# Altium PCB DUTBoard_NO_CAPS.PcbDoc (part 1 of 5)
Units mil, origin at the board's own origin, x right, y up, seen from the top; angles counter-clockwise.
Board outline 5475 x 5475 mil, 4 copper layers (Top Layer, Mid-Layer 1, Mid-Layer 2, Bottom Layer); 57 components, 471 nets, 1641 pads, 1070 vias.
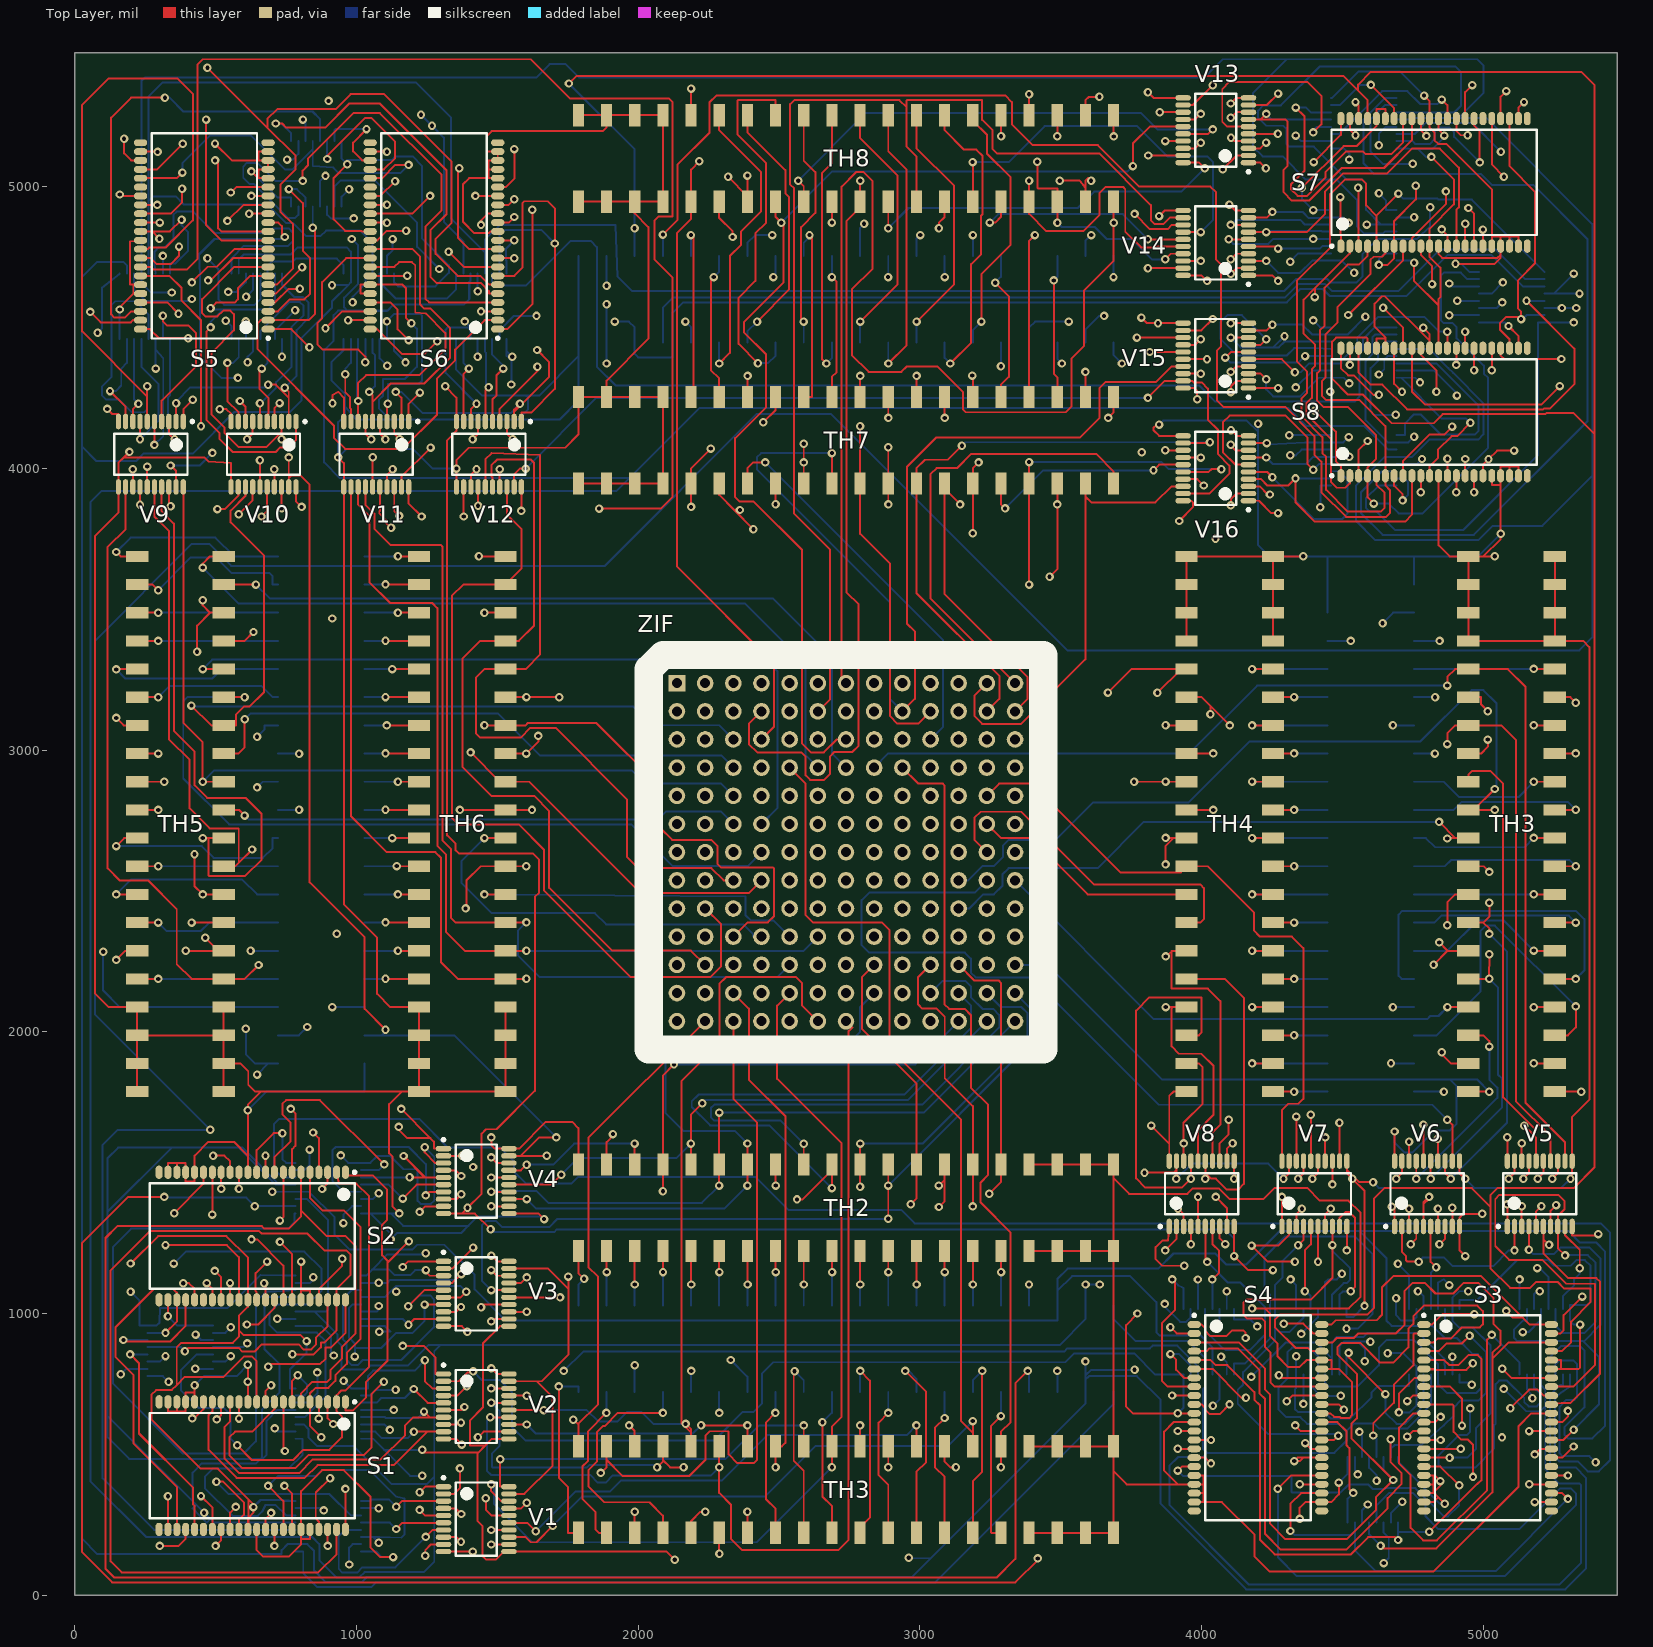
[diagram p0: Top Layer view]
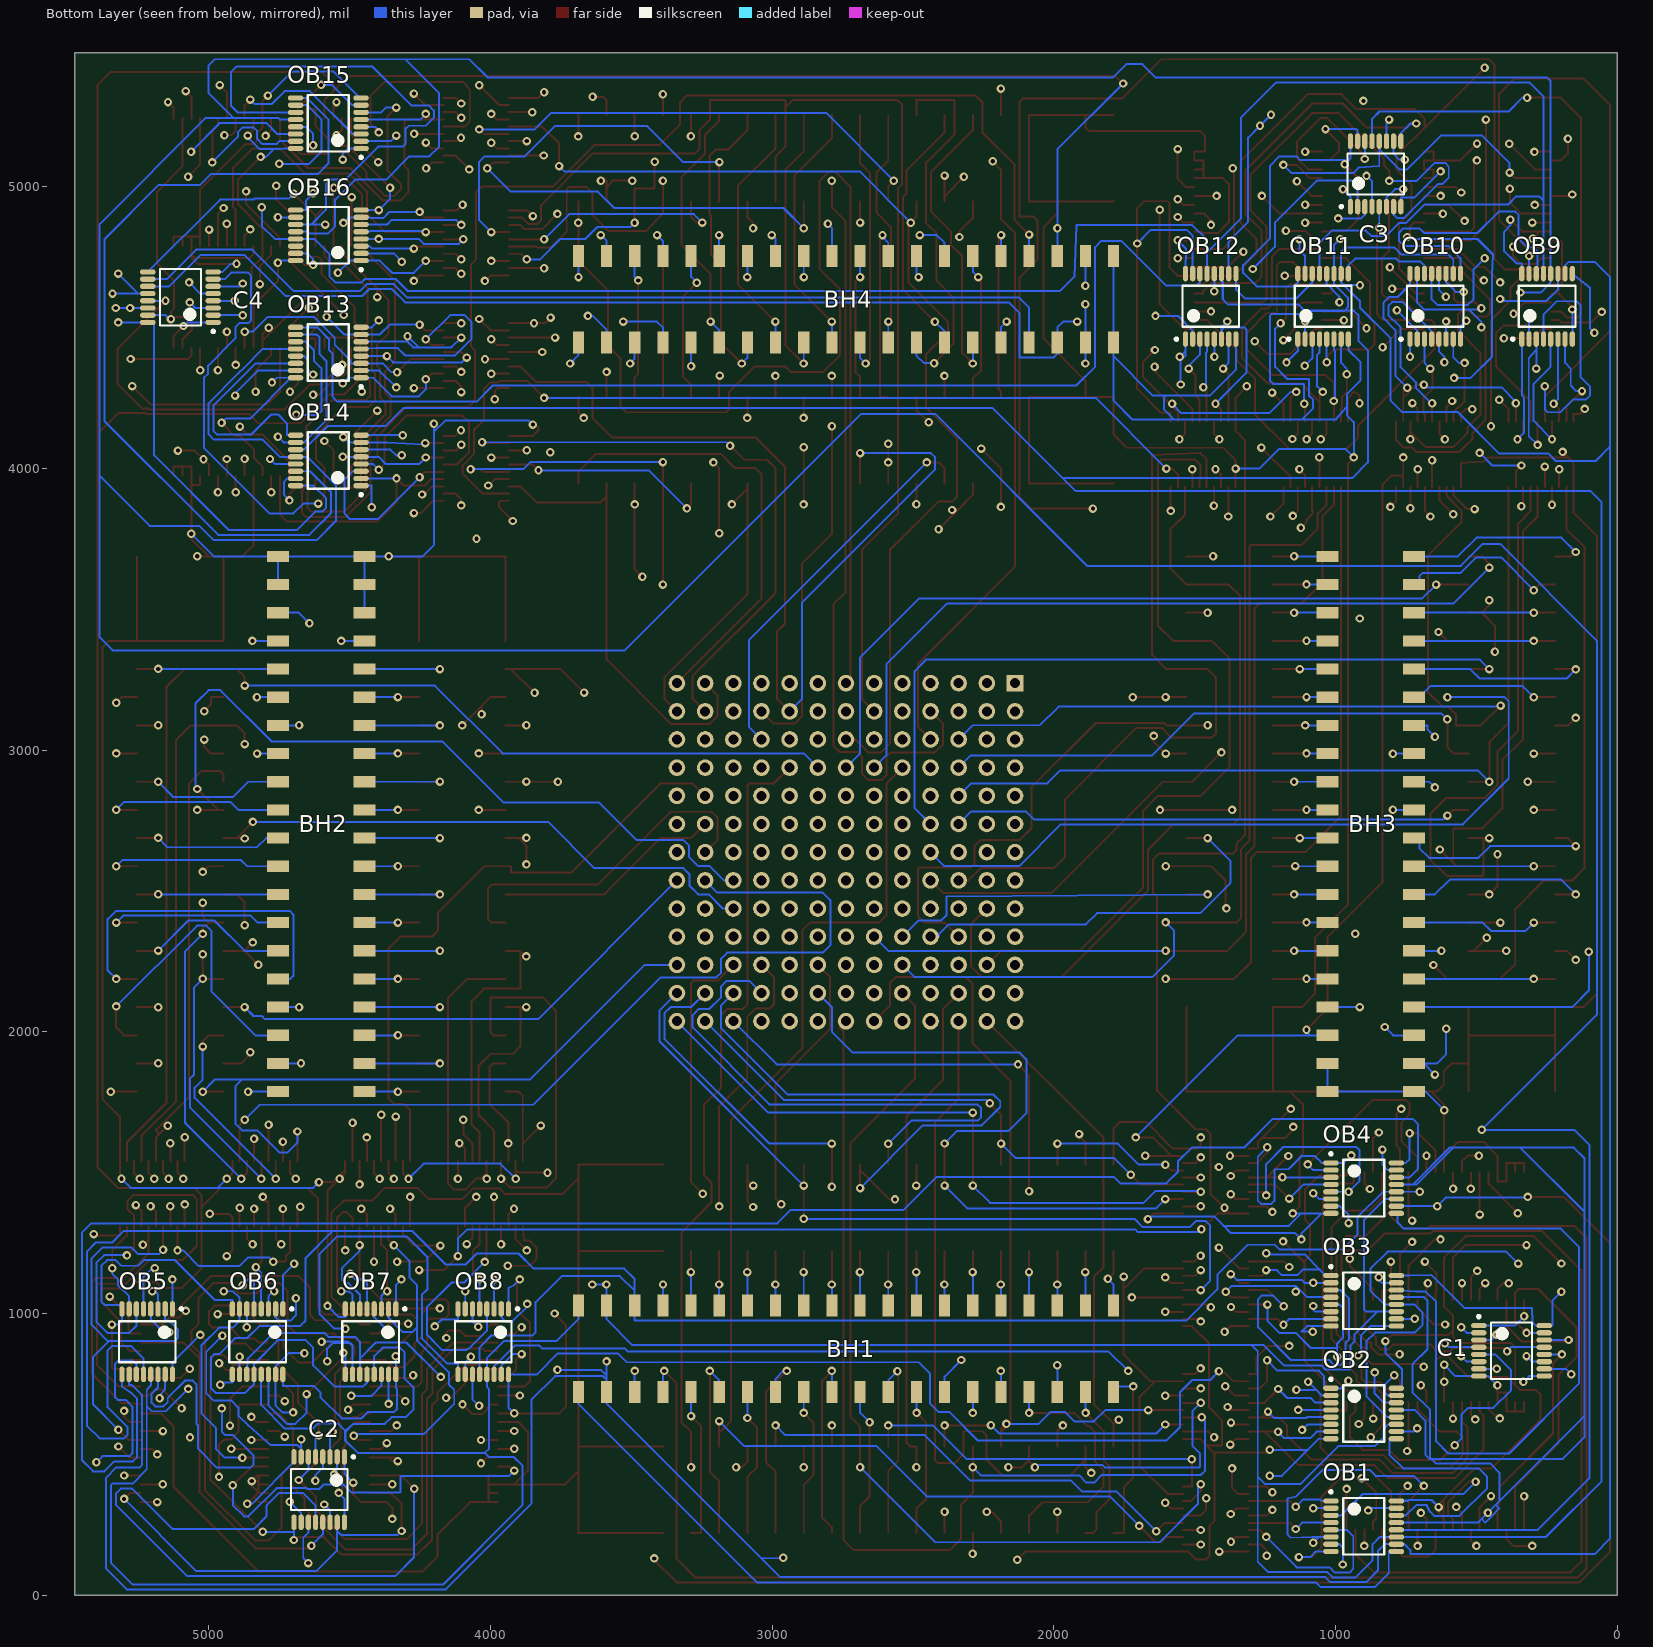
[diagram p1: Bottom Layer view, seen from below]
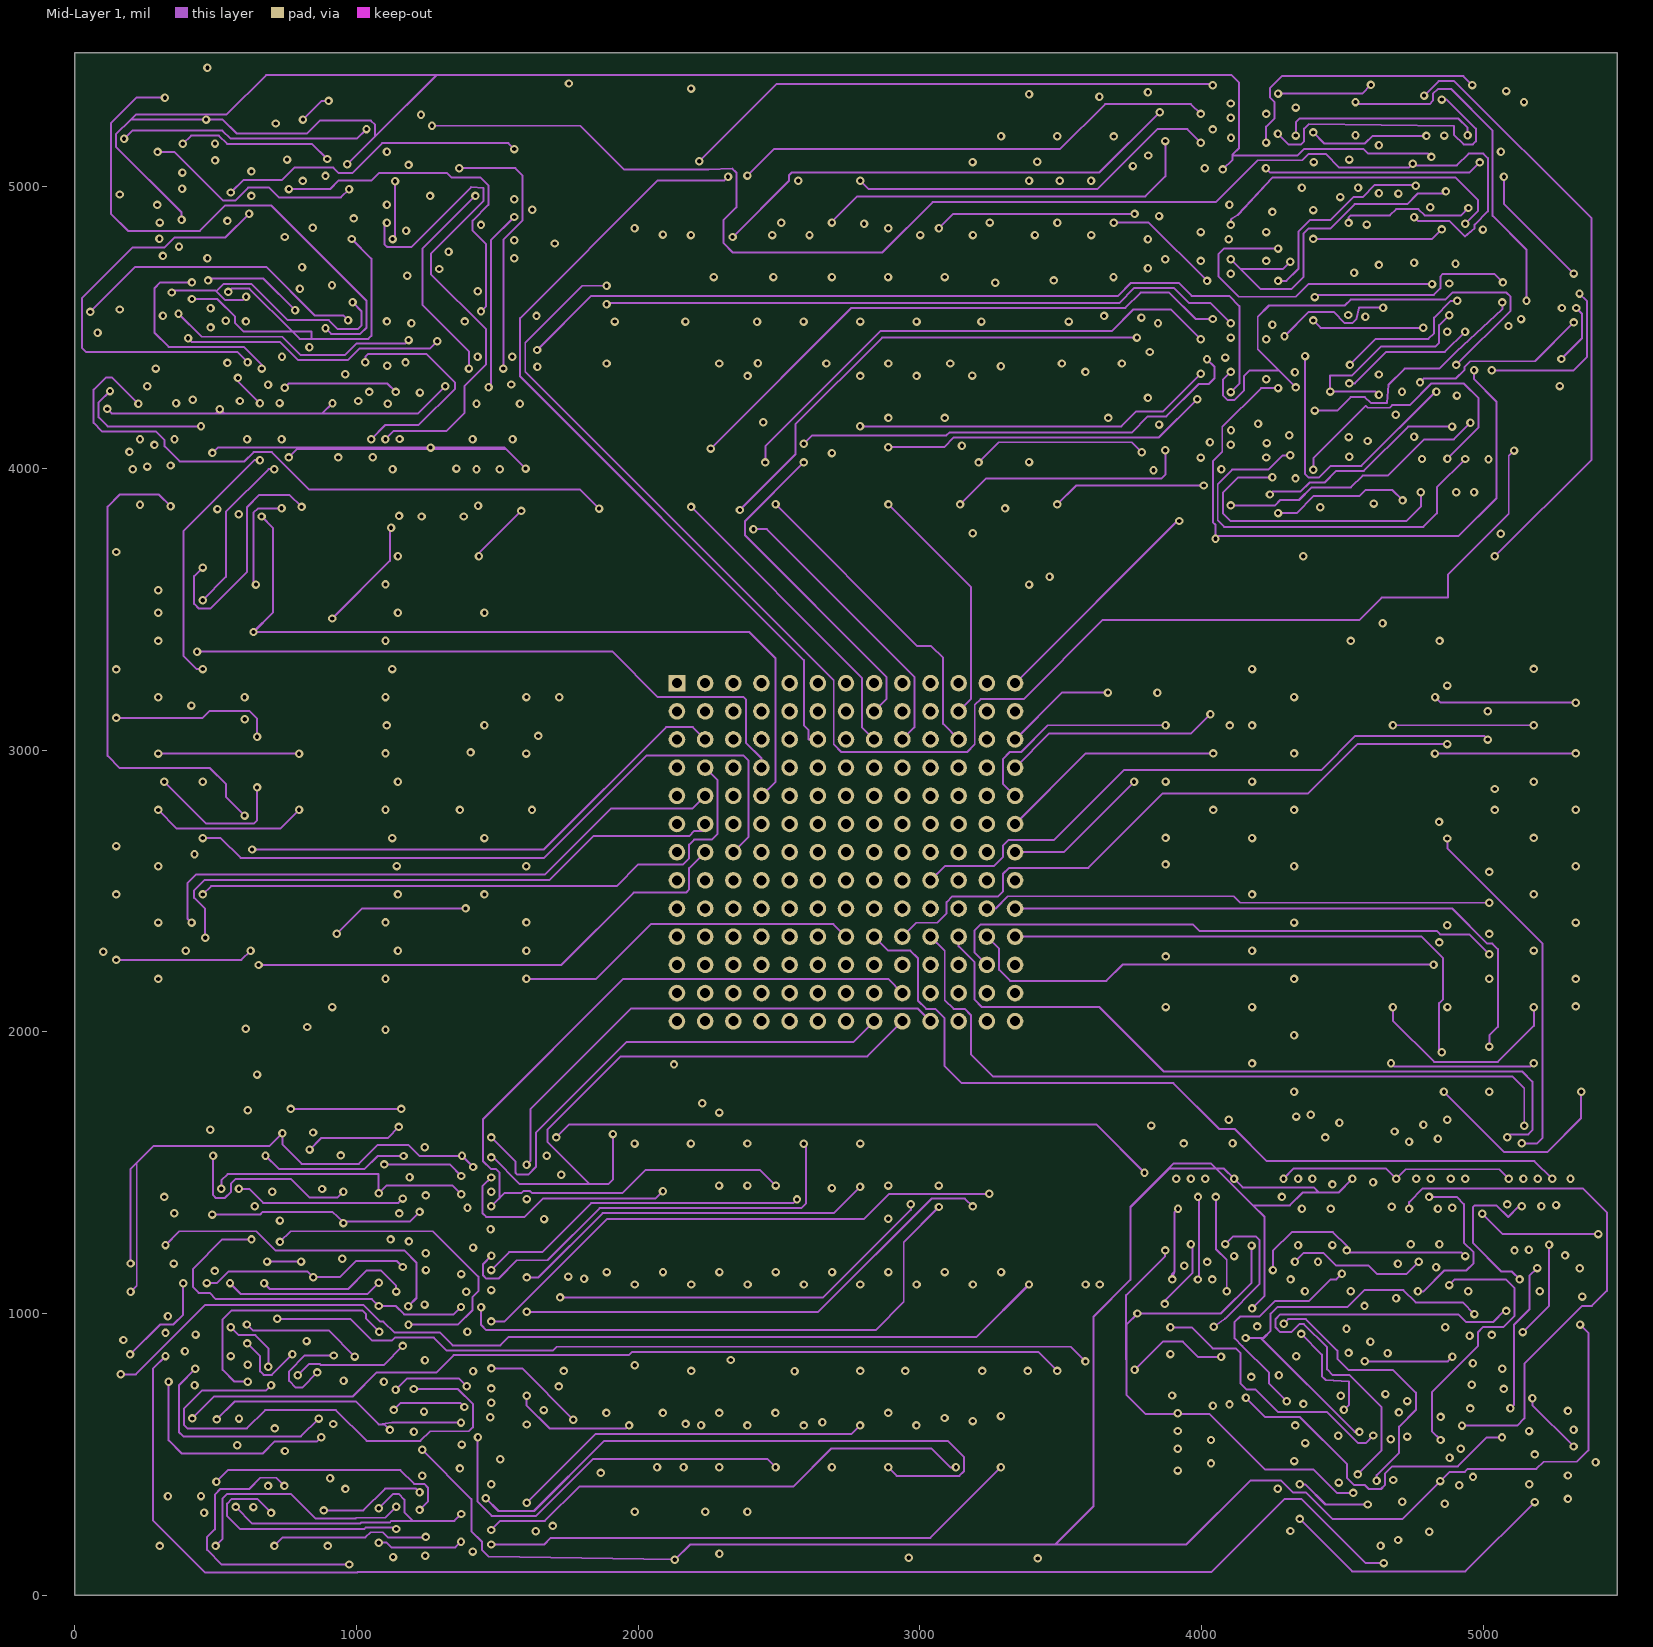
[diagram p2: Mid-Layer 1]
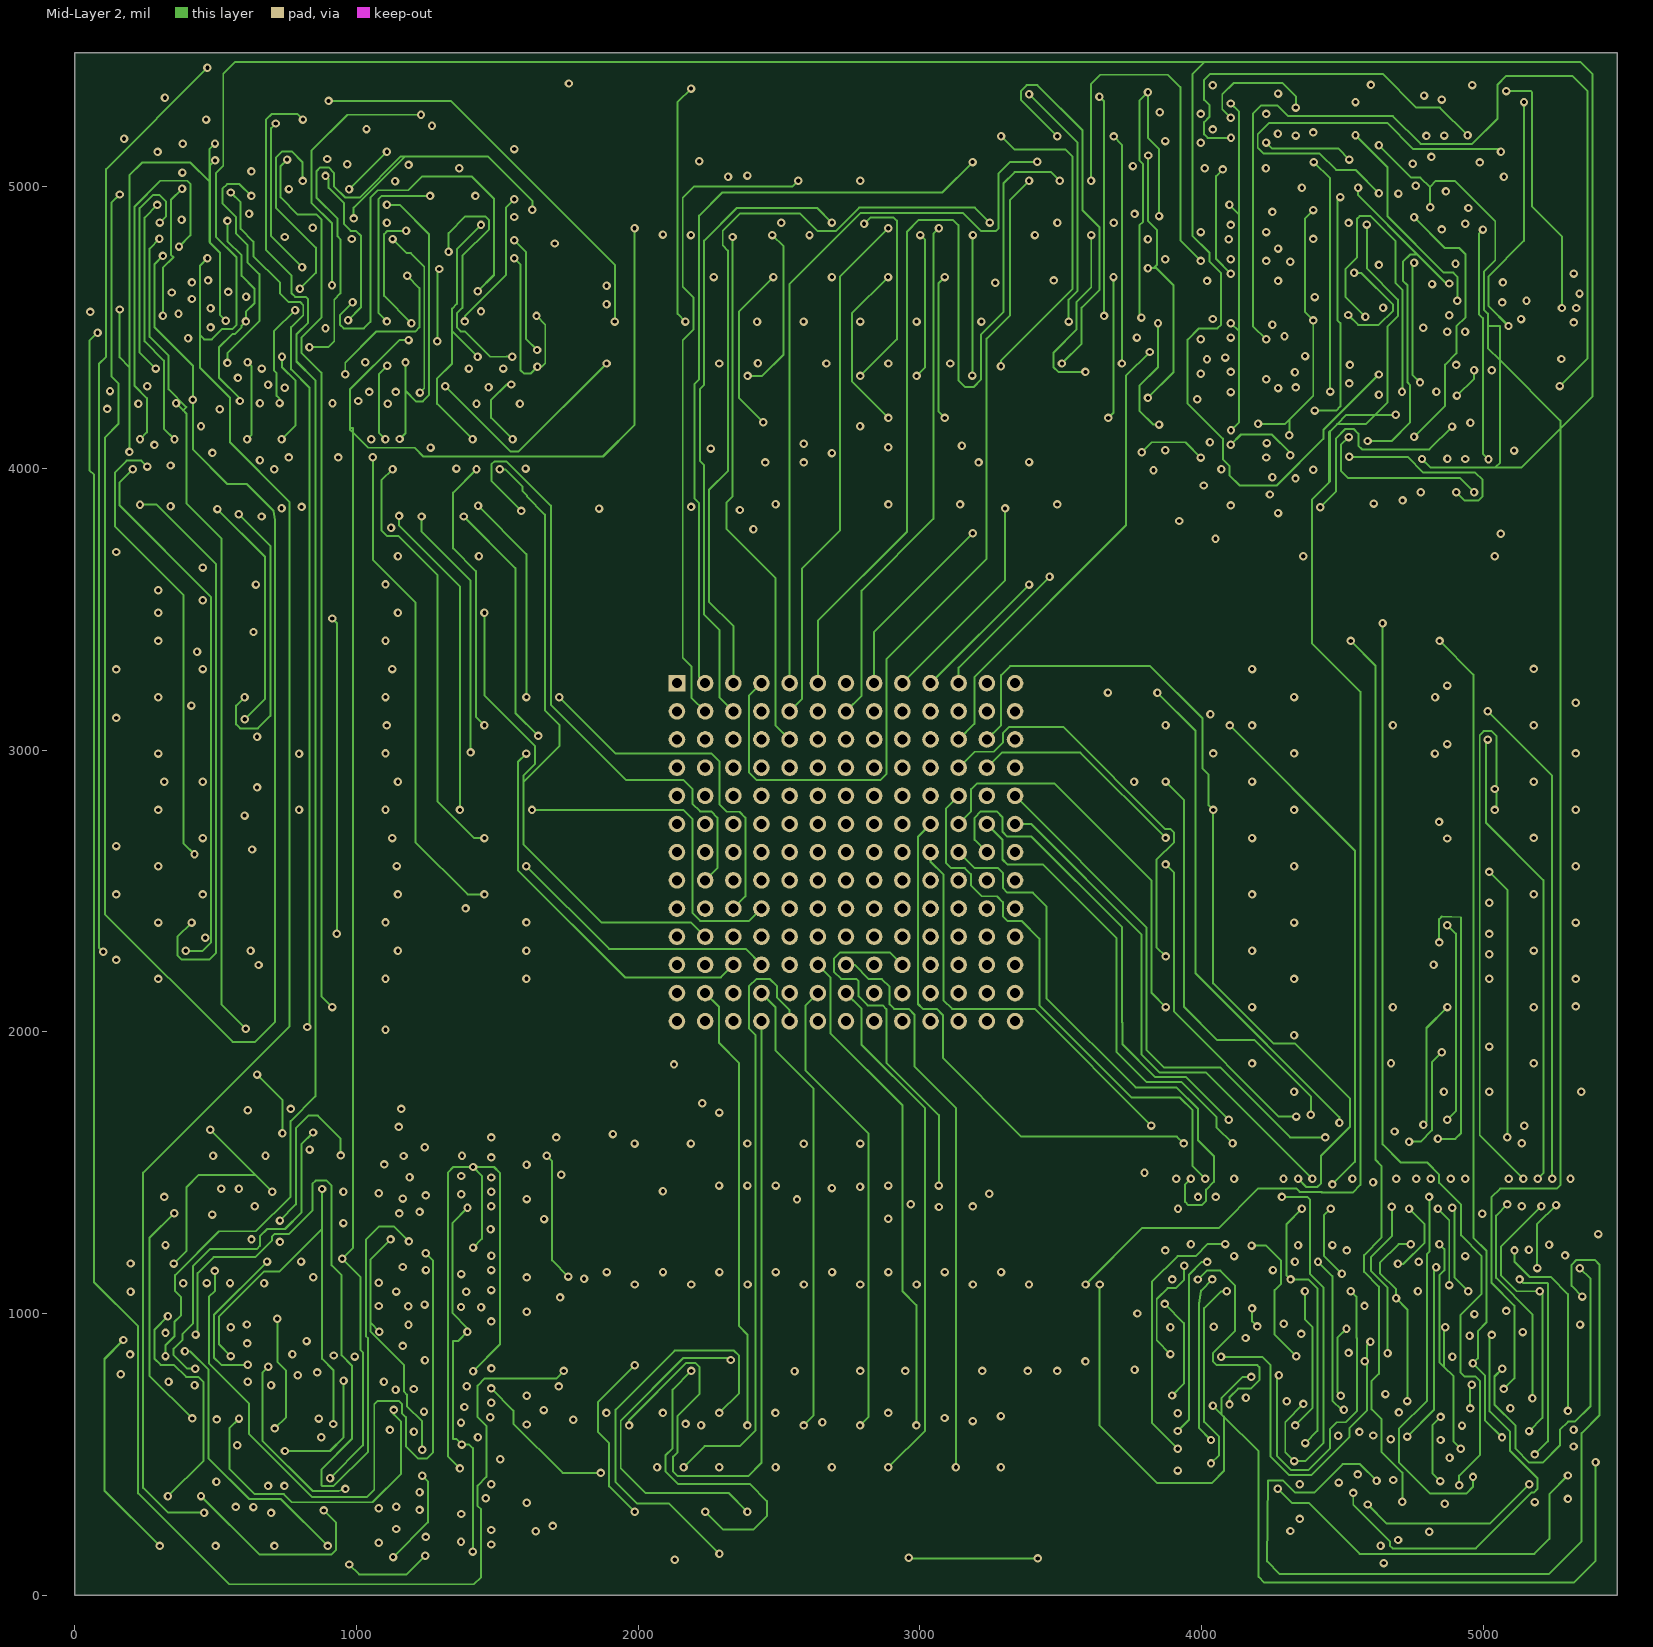
[diagram p3: Mid-Layer 2]
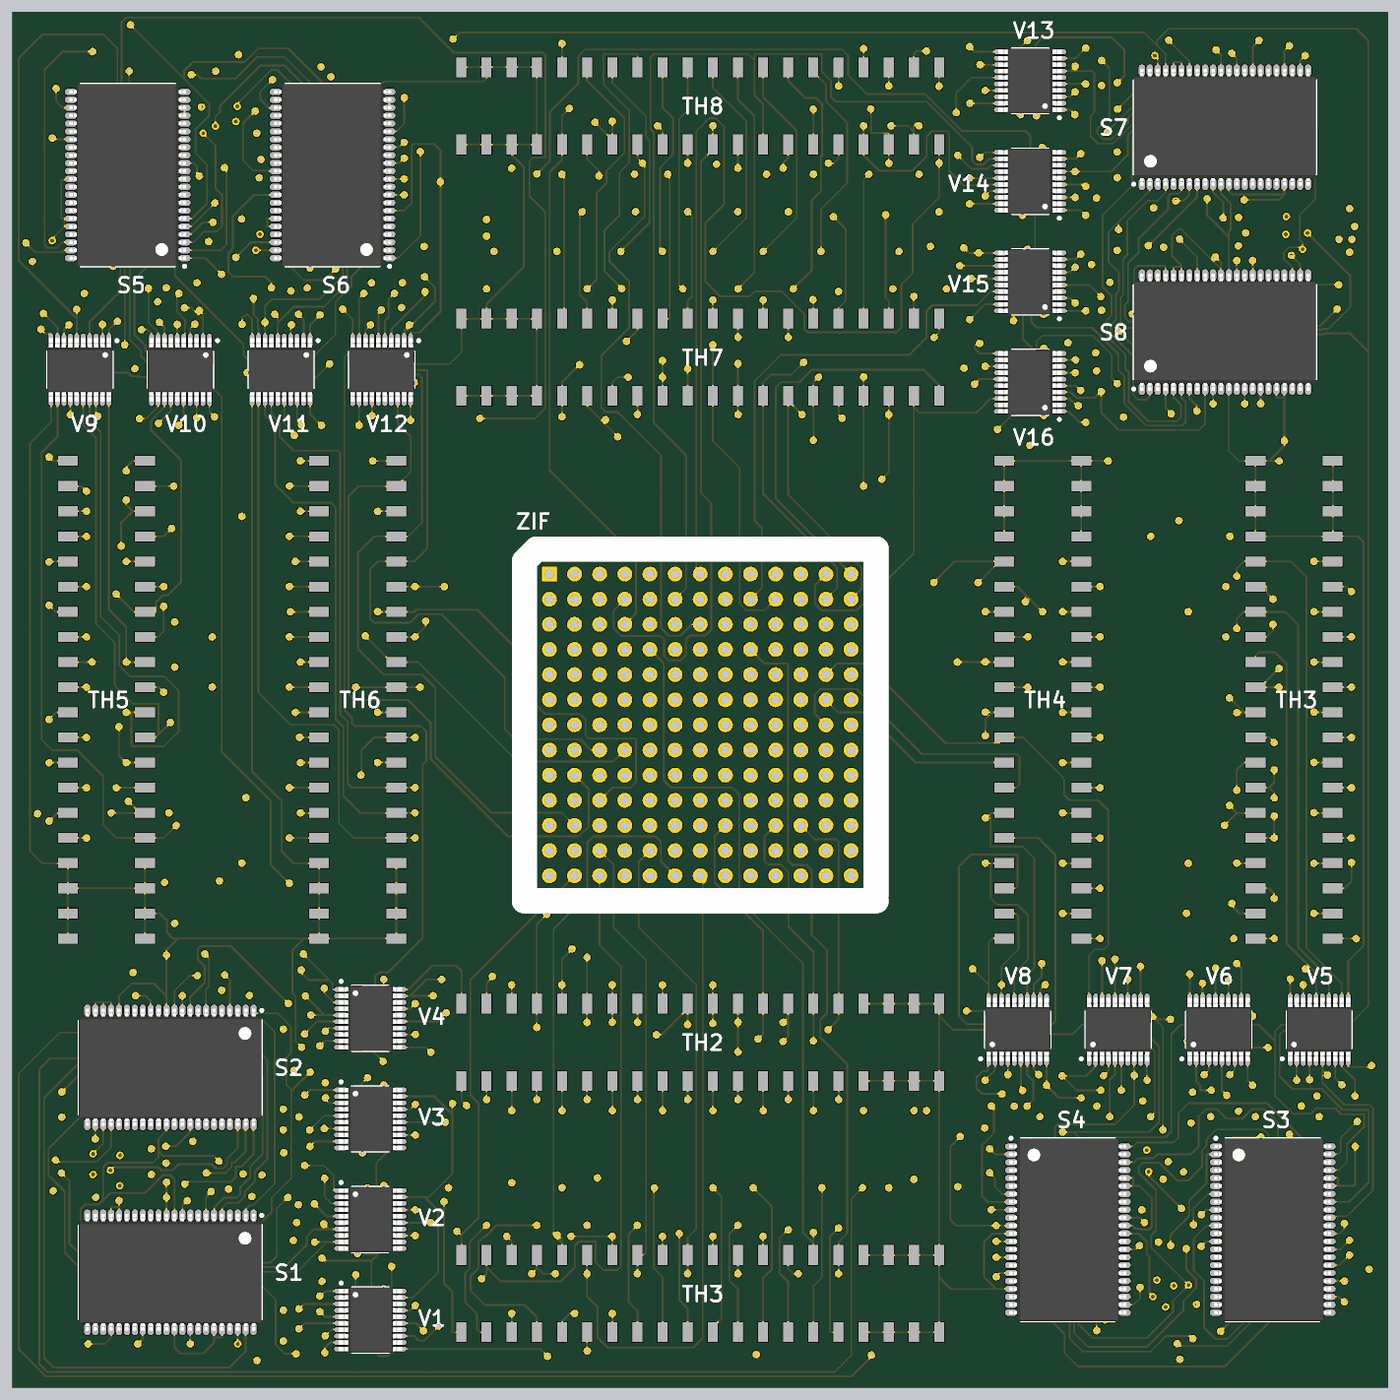
[diagram p8: 3D render of the assembled board from above, using the file's embedded part models]
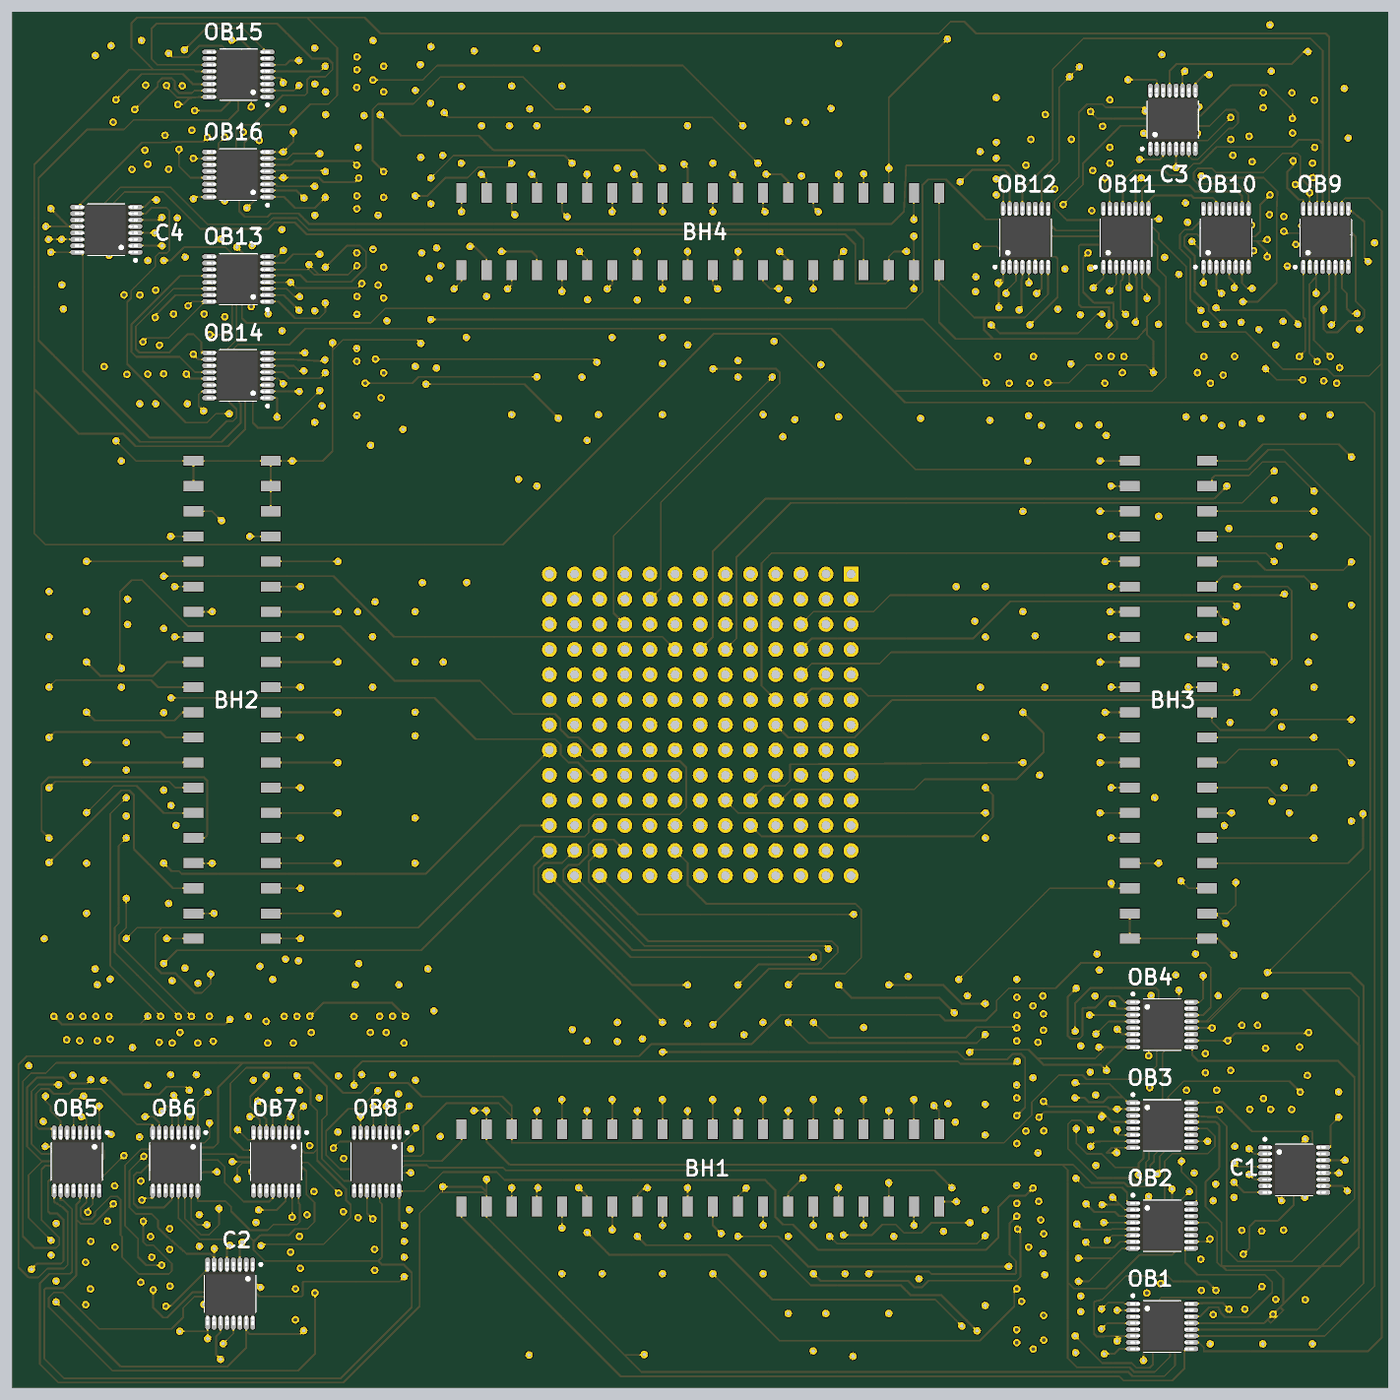
[diagram p9: 3D render of the assembled board from below, using the file's embedded part models]

## Layer stack, top to bottom
Top Solder: solder mask 0.4, Solder Resist, Dk 3.5
Top Layer: signal copper 1.4
Dielectric 1: dielectric 12.6, FR-4, Dk 4.8
Mid-Layer 1: signal copper 1.4
Dielectric2: dielectric 12.6, FR-4, Dk 4.8
Mid-Layer 2: signal copper 1.4
Dielectric3: dielectric 12.6, FR-4, Dk 4.8
Bottom Layer: signal copper 1.4
Bottom Solder: solder mask 0.4, Solder Resist, Dk 3.5

## Board outline
0,0 5475,0 5475,5475 0,5475

## Design rules (kind name [scope] priority, off if disabled: settings)
BoardOutlineClearance [All] p1: gap=20
Clearance DifferentViaPadClearance [IsPad vs IsVia] p1: gap=20
Clearance SameViaPadClearance [IsPad vs IsVia] p2: gap=20
Clearance DifferentViaViaClearance [IsVia vs IsVia] p3: gap=20
Clearance SameViaViaClearance [All] p4: gap=10 except(6: SMDPad-SMDPad)
Clearance DifferentGeneralClearance [All] p5: gap=10 except(6: SMDPad-SMDPad)
Clearance SameGeneralClearance [IsVia vs IsVia] p6: gap=20
HoleSize [All] p1: absolutevalues=TRUE maxlimit=50 minlimit=15 maxpercent=80.000 minpercent=20.000
MinimumAnnularRing [All] p1: minimumring=7
MinimumSolderMaskSliver [All] p1: minsoldermaskwidth=6
PolygonConnect [All] p1: connectstyle=Relief reliefconductorwidth=10 reliefentries=4 polygonreliefangle="90 Angle" airgapwidth=10
RoutingCorners [All] p1: cornerstyle=45-Degree minsetback=50 maxsetback=50
RoutingVias [All] p1: holewidth=15 width=30 viastyle="Through Hole" minholewidth=15 minwidth=30 maxholewidth=15 maxwidth=30
SolderMaskExpansion [All] p1: expansion=4
Width [All] p1: maxlimit=7 minlimit=7 preferedwidth=7
27 further rules are at their usual default settings.

## Classes and differential pairs
component class U_COUNTER_WRP1: C1
component class U_COUNTER_WRP2: C2
component class U_COUNTER_WRP3: C3
component class U_COUNTER_WRP4: C4
component class U_OB_WRP2: OB2
component class U_OB_WRP3: OB3
component class U_OB_WRP4: OB4
component class U_OB_WRP5: OB5
component class U_OB_WRP7: OB7
component class U_OB_WRP8: OB8
component class U_OB_WRP9: OB9
component class U_OB_WRP10: OB10
component class U_OB_WRP11: OB11
component class U_OB_WRP12: OB12
component class U_OB_WRP13: OB13
component class U_OB_WRP14: OB14
component class U_OB_WRP15: OB15
component class U_OB_WRP16: OB16
component class U_SRAM_WRP2: S2
component class U_SRAM_WRP3: S3
component class U_SRAM_WRP4: S4
component class U_SRAM_WRP5: S5
component class U_SRAM_WRP6: S6
component class U_SRAM_WRP7: S8
component class U_SRAM_WRP8: S7
component class U_VT_WRP1: V1
component class U_VT_WRP2: V2
component class U_VT_WRP3: V3
component class U_VT_WRP4: V4
component class U_VT_WRP5: V5
component class U_VT_WRP6: V6
component class U_VT_WRP7: V7
component class U_VT_WRP8: V8
component class U_VT_WRP9: V9
component class U_VT_WRP10: V10
component class U_VT_WRP11: V11
component class U_VT_WRP12: V12
component class U_VT_WRP15: V13
component class U_VT_WRP16: V14
channel class COUNTER_WRP: U_COUNTER_WRP1 U_COUNTER_WRP2 U_COUNTER_WRP3 U_COUNTER_WRP4
channel class OB_WRP: U_OB_WRP1 U_OB_WRP2 U_OB_WRP3 U_OB_WRP4 U_OB_WRP5 U_OB_WRP6 U_OB_WRP7 U_OB_WRP8 U_OB_WRP9 U_OB_WRP10 U_OB_WRP11 U_OB_WRP12 U_OB_WRP13 U_OB_WRP14 U_OB_WRP15 U_OB_WRP16
channel class SRAM_WRP: U_SRAM_WRP1 U_SRAM_WRP2 U_SRAM_WRP3 U_SRAM_WRP4 U_SRAM_WRP5 U_SRAM_WRP6 U_SRAM_WRP7 U_SRAM_WRP8
channel class VT_WRP: U_VT_WRP1 U_VT_WRP2 U_VT_WRP3 U_VT_WRP4 U_VT_WRP5 U_VT_WRP6 U_VT_WRP7 U_VT_WRP8 U_VT_WRP9 U_VT_WRP10 U_VT_WRP11 U_VT_WRP12 U_VT_WRP13 U_VT_WRP14 U_VT_WRP15 U_VT_WRP16
component class U_BOTTOM_HEADER_WRP1: BH1
component class U_BOTTOM_HEADER_WRP2: BH2
component class U_BOTTOM_HEADER_WRP3: BH3
component class U_BOTTOM_HEADER_WRP4: BH4
component class U_TOP_HEADER_WRP1: TH3
component class U_TOP_HEADER_WRP2: TH2
component class U_TOP_HEADER_WRP4: TH4
component class U_TOP_HEADER_WRP5: TH5
component class U_TOP_HEADER_WRP6: TH6
component class U_TOP_HEADER_WRP7: TH7
component class U_TOP_HEADER_WRP8: TH8
net class INSIDE_B[111..0]: INSIDE_B0 INSIDE_B1 INSIDE_B2 INSIDE_B3 INSIDE_B4 INSIDE_B5 INSIDE_B6 INSIDE_B7 INSIDE_B8 INSIDE_B9 INSIDE_B10 INSIDE_B11 INSIDE_B12 INSIDE_B13 INSIDE_B14 INSIDE_B15 INSIDE_B16 INSIDE_B17 INSIDE_B18 INSIDE_B19 INSIDE_B20 INSIDE_B21 INSIDE_B22 INSIDE_B23 INSIDE_B24 INSIDE_B25 INSIDE_B26 INSIDE_B27 INSIDE_B28 INSIDE_B29 INSIDE_B30 INSIDE_B31 INSIDE_B32 INSIDE_B33 INSIDE_B34 INSIDE_B35 INSIDE_B36 INSIDE_B37 INSIDE_B38 INSIDE_B39 INSIDE_B40 INSIDE_B41 INSIDE_B42 INSIDE_B43 INSIDE_B44 INSIDE_B45 INSIDE_B46 INSIDE_B47 INSIDE_B48 INSIDE_B49 INSIDE_B50 INSIDE_B51 INSIDE_B52 INSIDE_B53 INSIDE_B54 INSIDE_B55 INSIDE_B56 INSIDE_B57 INSIDE_B58 INSIDE_B59 INSIDE_B60 INSIDE_B61 INSIDE_B62 INSIDE_B63 INSIDE_B64 INSIDE_B65 INSIDE_B66 INSIDE_B67 INSIDE_B68 INSIDE_B69 INSIDE_B70 INSIDE_B71 INSIDE_B72 INSIDE_B73 INSIDE_B74 INSIDE_B75 INSIDE_B76 INSIDE_B77 INSIDE_B78 INSIDE_B79 INSIDE_B80 INSIDE_B81 INSIDE_B82 INSIDE_B83 INSIDE_B84 INSIDE_B85 INSIDE_B86 INSIDE_B87 INSIDE_B88 INSIDE_B89 INSIDE_B90 INSIDE_B91 INSIDE_B92 INSIDE_B93 INSIDE_B94 INSIDE_B95 INSIDE_B96 INSIDE_B97 INSIDE_B98 INSIDE_B99 INSIDE_B100 INSIDE_B101 INSIDE_B102 INSIDE_B103 INSIDE_B104 INSIDE_B105 INSIDE_B106 INSIDE_B107 INSIDE_B108 INSIDE_B109 INSIDE_B110 INSIDE_B111 INSIDE_B112 INSIDE_B113 INSIDE_B114 INSIDE_B115 INSIDE_B116 INSIDE_B117 INSIDE_B118 INSIDE_B119 INSIDE_B120 INSIDE_B121 INSIDE_B122 INSIDE_B123 INSIDE_B124 INSIDE_B125 INSIDE_B126 INSIDE_B127
channel class BOTTOM_HEADER_WRP: U_BOTTOM_HEADER_WRP1 U_BOTTOM_HEADER_WRP2 U_BOTTOM_HEADER_WRP3 U_BOTTOM_HEADER_WRP4
channel class COMBINED_HEADER_WRP: U_COMBINED_HEADER_WRP1 U_COMBINED_HEADER_WRP2 U_COMBINED_HEADER_WRP3 U_COMBINED_HEADER_WRP4
channel class TOP_HEADER_WRP: U_TOP_HEADER_WRP1 U_TOP_HEADER_WRP2 U_TOP_HEADER_WRP3 U_TOP_HEADER_WRP4 U_TOP_HEADER_WRP5 U_TOP_HEADER_WRP6 U_TOP_HEADER_WRP7 U_TOP_HEADER_WRP8

## Components (designator, comment, footprint, x,y, rotation, side; value= is the part's Value field where it differs from the comment)
BH1 "ADAFRUIT_HEADER" FEMALE_HEADER_SMD 2737.5,875 r0 bottom (schematic designator ETH1)
BH2 "ADAFRUIT_HEADER" FEMALE_HEADER_SMD 4600,2737.5 r90 bottom (schematic designator ETH1)
BH3 "ADAFRUIT_HEADER" FEMALE_HEADER_SMD 875,2737.5 r270 bottom (schematic designator ETH1)
BH4 "ADAFRUIT_HEADER" FEMALE_HEADER_SMD 2737.5,4600 r180 bottom (schematic designator ETH1)
C1 "74VHC4040FT(BJ)" COUNTER_TSSOP16 375,867.5 r180 bottom (schematic designator COUNTER1)
C2 "74VHC4040FT(BJ)" COUNTER_TSSOP16 4607.5,375 r270 bottom (schematic designator COUNTER1)
C3 "74VHC4040FT(BJ)" COUNTER_TSSOP16 857.5,5045 r90 bottom (schematic designator COUNTER1)
C4 "74VHC4040FT(BJ)" COUNTER_TSSOP16 5100,4607.5 r0 bottom (schematic designator COUNTER1)
OB1 "74HC597PW,118" OB_TSSOP16 900,245 r180 bottom
OB2 "74HC597PW,118" OB_TSSOP16 900,645 r180 bottom (schematic designator OB1)
OB3 "74HC597PW,118" OB_TSSOP16 900,1045 r180 bottom (schematic designator OB1)
OB4 "74HC597PW,118" OB_TSSOP16 900,1445 r180 bottom (schematic designator OB1)
OB5 "74HC597PW,118" OB_TSSOP16 5218,900 r270 bottom (schematic designator OB1)
OB6 "74HC597PW,118" OB_TSSOP16 4826,900 r270 bottom (schematic designator OB1)
OB7 "74HC597PW,118" OB_TSSOP16 4425,900 r270 bottom (schematic designator OB1)
OB8 "74HC597PW,118" OB_TSSOP16 4025,900 r270 bottom (schematic designator OB1)
OB9 "74HC597PW,118" OB_TSSOP16 249,4575 r90 bottom (schematic designator OB1)
OB10 "74HC597PW,118" OB_TSSOP16 646,4575 r90 bottom (schematic designator OB1)
OB11 "74HC597PW,118" OB_TSSOP16 1044,4575 r90 bottom (schematic designator OB1)
OB12 "74HC597PW,118" OB_TSSOP16 1443,4575 r90 bottom (schematic designator OB1)
OB13 "74HC597PW,118" OB_TSSOP16 4575,4411 r0 bottom (schematic designator OB1)
OB14 "74HC597PW,118" OB_TSSOP16 4575,4028 r0 bottom (schematic designator OB1)
OB15 "74HC597PW,118" OB_TSSOP16 4575,5225 r0 bottom (schematic designator OB1)
OB16 "74HC597PW,118" OB_TSSOP16 4575,4827 r0 bottom (schematic designator OB1)
S1 "71V016SA10PHG" SRAM_TSSOP44-II 630,460 r270 top (schematic designator SRAM1)
S2 "71V016SA10PHG" SRAM_TSSOP44-II 630,1275 r270 top (schematic designator SRAM1)
S3 "71V016SA10PHG" SRAM_TSSOP44-II 5015,630 r0 top (schematic designator SRAM1)
S4 "71V016SA10PHG" SRAM_TSSOP44-II 4200,630 r0 top (schematic designator SRAM1)
S5 "71V016SA10PHG" SRAM_TSSOP44-II 460,4825 r180 top (schematic designator SRAM1)
S6 "71V016SA10PHG" SRAM_TSSOP44-II 1275,4825 r180 top (schematic designator SRAM1)
S7 "71V016SA10PHG" SRAM_TSSOP44-II 4825,5015 r90 top (schematic designator SRAM1)
S8 "71V016SA10PHG" SRAM_TSSOP44-II 4825,4200 r90 top (schematic designator SRAM1)
TH2 "ADAFRUIT_HEADER" FEMALE_HEADER_SMD 2737.5,1375 r0 top (schematic designator ETH1)
TH3 "ADAFRUIT_HEADER" FEMALE_HEADER_SMD 2737.5,375 r0 top (schematic designator ETH1)
TH3 "ADAFRUIT_HEADER" FEMALE_HEADER_SMD 5100,2737.5 r90 top (schematic designator ETH1)
TH4 "ADAFRUIT_HEADER" FEMALE_HEADER_SMD 4100,2737.5 r90 top (schematic designator ETH1)
TH5 "ADAFRUIT_HEADER" FEMALE_HEADER_SMD 375,2737.5 r270 top (schematic designator ETH1)
TH6 "ADAFRUIT_HEADER" FEMALE_HEADER_SMD 1375,2737.5 r270 top (schematic designator ETH1)
TH7 "ADAFRUIT_HEADER" FEMALE_HEADER_SMD 2737.5,4100 r180 top (schematic designator ETH1)
TH8 "ADAFRUIT_HEADER" FEMALE_HEADER_SMD 2737.5,5100 r180 top (schematic designator ETH1)
V1 "MAX3012EUP+" VT_TSSOP20 1425,270 r0 top (schematic designator VT1)
V2 "MAX3012EUP+" VT_TSSOP20 1425,670 r0 top (schematic designator VT1)
V3 "MAX3012EUP+" VT_TSSOP20 1425,1070 r0 top (schematic designator VT1)
V4 "MAX3012EUP+" VT_TSSOP20 1425,1470 r0 top (schematic designator VT1)
V5 "MAX3012EUP+" VT_TSSOP20 5200,1425 r90 top (schematic designator VT1)
V6 "MAX3012EUP+" VT_TSSOP20 4800,1425 r90 top (schematic designator VT1)
V7 "MAX3012EUP+" VT_TSSOP20 4400,1425 r90 top (schematic designator VT1)
V8 "MAX3012EUP+" VT_TSSOP20 4000,1425 r90 top (schematic designator VT1)
V9 "MAX3012EUP+" VT_TSSOP20 270,4050 r270 top (schematic designator VT1)
V10 "MAX3012EUP+" VT_TSSOP20 670,4050 r270 top (schematic designator VT1)
V11 "MAX3012EUP+" VT_TSSOP20 1070,4050 r270 top (schematic designator VT1)
V12 "MAX3012EUP+" VT_TSSOP20 1470,4050 r270 top (schematic designator VT1)
V13 "MAX3012EUP+" VT_TSSOP20 4050,5200 r180 top (schematic designator VT1)
V14 "MAX3012EUP+" VT_TSSOP20 4050,4800 r180 top (schematic designator VT1)
V15 "MAX3012EUP+" VT_TSSOP20 4050,4400 r180 top (schematic designator VT1)
V16 "MAX3012EUP+" VT_TSSOP20 4050,4000 r180 top (schematic designator VT1)
ZIF "200-6313-9UN-1900" ZIF_13x13 2737.5,2637.5 r0 top (schematic designator ZIF1)

## Footprints (in the part's own frame and the unit in brackets; to place one, negate y for a bottom-side part, rotate by r counter-clockwise, add the part's x,y. Pads: shape width x height; smd on the part's side, far side on the other; paste and mask are expansions set on the pad)
COUNTER_TSSOP16 [mm] "TSOP, 16-Leads, Body 5.00x4.40mm, Pitch 0.65mm, IPC Medium Density"
  oval 1.4x0.475 smd: ADDR0(2.95,-2.275) ADDR1(-2.95,-1.625) ADDR2(-2.95,-0.975) ADDR3(-2.95,-0.325) ADDR4(-2.95,0.975) ADDR5(-2.95,1.625) ADDR6(-2.95,0.325) ADDR7(2.95,0.325) ADDR8(2.95,-0.325) ADDR9(2.95,0.975) ADDR10(2.95,1.625) ADDR11(-2.95,2.275) CLR(2.95,-0.975) GND(-2.95,-2.275) VCC(2.95,2.275) ~CLK(2.95,-1.625)
  silkscreen extent -3.08,-2.55 1.85,3.21, body extent -3.2,-2.55 3.2,2.55, height 1.2
FEMALE_HEADER_SMD [mm]
  rect 1x2 smd: 1(-24.13,-3.9) 2(-21.59,-3.9) 3(-19.05,-3.9) 4(-16.51,-3.9) 5(-13.97,-3.9) 6(-11.43,-3.9) 7(-8.89,-3.9) 8(-6.35,-3.9) 9(-3.81,-3.9) 10(-1.27,-3.9) 11(1.27,-3.9) 12(3.81,-3.9) 13(6.35,-3.9) 14(8.89,-3.9) 15(11.43,-3.9) 16(13.97,-3.9) 17(16.51,-3.9) 18(19.05,-3.9) 19(21.59,-3.9) 20(24.13,-3.9) 21(24.13,3.9) 22(21.59,3.9) 23(19.05,3.9) 24(16.51,3.9) 25(13.97,3.9) 26(11.43,3.9) 27(8.89,3.9) 28(6.35,3.9) 29(3.81,3.9) 30(1.27,3.9) 31(-1.27,3.9) 32(-3.81,3.9) 33(-6.35,3.9) 34(-8.89,3.9) 35(-11.43,3.9) 36(-13.97,3.9) 37(-16.51,3.9) 38(-19.05,3.9) 39(-21.59,3.9) 40(-24.13,3.9)
OB_TSSOP16 [mm] "TSOP, 16-Leads, Body 5.00x4.40mm, Pitch 0.65mm, IPC Medium Density"
  oval 1.4x0.475 smd: D0(2.95,1.625) D1(-2.95,2.275) D2(-2.95,1.625) D3(-2.95,0.975) D4(-2.95,0.325) D5(-2.95,-0.325) D6(-2.95,-0.975) D7(-2.95,-1.625) DS(2.95,0.975) GND(-2.95,-2.275) Q(2.95,-2.275) SHCP(2.95,-0.975) STCP(2.95,-0.325) VCC(2.95,2.275) ~MR(2.95,-1.625) ~PL(2.95,0.325)
  silkscreen extent -3.08,-2.55 1.85,3.21, body extent -3.2,-2.55 3.2,2.55, height 1.1
SRAM_TSSOP44-II [mm] "TSOP, 44-Leads, Body 18.41x10.16mm, Pitch 0.80mm, IPC Medium Density"
  oval 1.2x0.625 smd: ADDR0(-5.75,5.2) ADDR1(-5.75,6) ADDR2(-5.75,6.8) ADDR3(-5.75,7.6) ADDR4(-5.75,8.4) ADDR5(5.75,8.4) ADDR6(5.75,7.6) ADDR7(5.75,6.8) ADDR8(5.75,-5.2) ADDR9(5.75,-6) ADDR10(5.75,-6.8) ADDR11(5.75,-7.6) ADDR12(-5.75,-7.6) ADDR13(-5.75,-6.8) ADDR14(-5.75,-6) ADDR15(-5.75,-5.2) DATA0(-5.75,3.6) DATA1(-5.75,2.8) DATA2(-5.75,2) DATA3(-5.75,1.2) DATA4(-5.75,-1.2) DATA5(-5.75,-2) DATA6(-5.75,-2.8) DATA7(-5.75,-3.6) DATA8(5.75,-3.6) DATA9(5.75,-2.8) DATA10(5.75,-2) DATA11(5.75,-1.2) DATA12(5.75,1.2) DATA13(5.75,2) DATA14(5.75,2.8) DATA15(5.75,3.6) NC1(5.75,-8.4) NC2(5.75,-4.4) NC3(-5.75,-8.4) VDD(-5.75,0.4) VDD(5.75,-0.4) VSS(-5.75,-0.4) VSS(5.75,0.4) ~BHE(5.75,5.2) ~BLE(5.75,4.4) ~CS(-5.75,4.4) ~OE(5.75,6) ~WE(-5.75,-4.4)
  silkscreen extent -5.87,-9.25 4.75,9.35, body extent -5.92,-9.25 5.92,9.25, height 1.19
VT_TSSOP20 [mm] "TSOP, 20-Leads, Body 6.50x4.40mm, Pitch 0.65mm, IPC Medium Density"
  oval 1.4x0.475 smd: EN(-2.95,-2.925) GND(2.95,-2.925) IVCC0(2.95,2.925) IVCC1(2.95,1.625) IVCC2(2.95,0.975) IVCC3(2.95,0.325) IVCC4(2.95,-0.325) IVCC5(2.95,-0.975) IVCC6(2.95,-1.625) IVCC7(2.95,-2.275) OVL0(-2.95,2.925) OVL1(-2.95,1.625) OVL2(-2.95,0.975) OVL3(-2.95,0.325) OVL4(-2.95,-0.325) OVL5(-2.95,-0.975) OVL6(-2.95,-1.625) OVL7(-2.95,-2.275) VCC(2.95,2.275) VL(-2.95,2.275)
  silkscreen extent -3.07,-3.3 1.85,3.86, body extent -3.2,-3.3 3.2,3.3, height 1.1
ZIF_13x13 [mm]
  round 1.5 hole 0.9: 1(0,15.24) 2(-2.54,15.24) 3(-5.08,15.24) 4(-7.62,15.24) 5(-10.16,15.24) 6(-12.7,15.24) 7(0,12.7) 8(-2.54,12.7) 9(-5.08,12.7) 10(-7.62,12.7) 11(-10.16,12.7) 12(-12.7,12.7) 13(0,10.16) 14(-2.54,10.16) 15(-5.08,10.16) 16(-7.62,10.16) 17(15.24,15.24) 18(12.7,15.24) 19(10.16,15.24) 20(7.62,15.24) 21(5.08,15.24) 22(2.54,15.24) 23(15.24,12.7) 24(12.7,12.7) 25(10.16,12.7) 26(7.62,12.7) 27(5.08,12.7) 28(2.54,12.7) 29(10.16,10.16) 30(7.62,10.16) 31(5.08,10.16) 32(2.54,10.16) 33(-12.7,-2.54) 34(-12.7,-5.08) 35(-12.7,-7.62) 36(-12.7,-10.16) 37(-10.16,-2.54) 38(-10.16,-5.08) 39(-10.16,-7.62) 40(-10.16,-10.16) 41(-7.62,-2.54) 42(-7.62,-5.08) 43(-7.62,-7.62) 44(-7.62,-10.16) 45(-5.08,-7.62) 46(-5.08,-10.16) 47(-2.54,-7.62) 48(0,-7.62) 49(-2.54,7.62) 50(0,7.62) 51(-7.62,7.62) 52(-7.62,5.08) 53(-7.62,2.54) 54(-7.62,0) 55(-10.16,10.16) 56(-10.16,7.62) 57(-10.16,5.08) 58(-10.16,2.54) 59(-10.16,0) 60(-12.7,10.16) 61(-12.7,7.62) 62(-12.7,5.08) 63(-12.7,2.54) 64(-12.7,0) 65(7.62,0) 66(7.62,2.54) 67(10.16,0) 68(10.16,2.54) 69(10.16,5.08) 70(10.16,7.62) 71(12.7,0) 72(12.7,2.54) 73(12.7,5.08) 74(12.7,7.62) 75(12.7,10.16) 76(15.24,0) 77(15.24,2.54) 78(15.24,5.08) 79(15.24,7.62) 80(15.24,10.16) 81(15.24,-10.16) 82(15.24,-7.62) 83(15.24,-5.08) 84(15.24,-2.54) 85(12.7,-10.16) 86(12.7,-7.62) 87(12.7,-5.08) 88(12.7,-2.54) 89(10.16,-7.62) 90(10.16,-5.08) 91(10.16,-2.54) 92(7.62,-7.62) 93(7.62,-2.54) 94(5.08,-7.62) 95(2.54,-7.62) 96(2.54,7.62) 97(2.54,-15.24) 98(5.08,-15.24) 99(7.62,-15.24) 100(10.16,-15.24) 101(12.7,-15.24) 102(15.24,-15.24) 103(2.54,-12.7) 104(5.08,-12.7) 105(7.62,-12.7) 106(10.16,-12.7) 107(12.7,-12.7) 108(15.24,-12.7) 109(2.54,-10.16) 110(5.08,-10.16) 111(7.62,-10.16) 112(10.16,-10.16) 113(-12.7,-15.24) 114(-10.16,-15.24) 115(-7.62,-15.24) 116(-5.08,-15.24) 117(-2.54,-15.24) 118(0,-15.24) 119(-12.7,-12.7) 120(-10.16,-12.7) 121(-7.62,-12.7) 122(-5.08,-12.7) 123(-2.54,-12.7) 124(0,-12.7) 125(-2.54,-10.16) 126(0,-10.16) 127(-5.08,7.62) 128(5.08,7.62) 129(7.62,7.62) 130(-5.08,5.08) 131(-2.54,5.08) 132(0,5.08) 133(2.54,5.08) 134(5.08,5.08) 135(7.62,5.08) 136(-5.08,2.54) 137(-2.54,2.54) 138(0,2.54) 139(2.54,2.54) 140(5.08,2.54) 141(-5.08,0) 142(-2.54,0) 143(0,0) 144(2.54,0) 145(5.08,0) 146(-5.08,-2.54) 147(-2.54,-2.54) 148(0,-2.54) 149(2.54,-2.54) 150(5.08,-2.54) 151(-5.08,-5.08) 152(-2.54,-5.08) 153(0,-5.08) 154(2.54,-5.08) 155(5.08,-5.08) 156(7.62,-5.08) 157(-15.24,-15.24) 158(-15.24,-12.7) 159(-15.24,-10.16) 160(-15.24,-7.62) 161(-15.24,-5.08) 162(-15.24,-2.54) 163(-15.24,0) 164(-15.24,2.54) 165(-15.24,5.08) 166(-15.24,7.62) 167(-15.24,10.16) 168(-15.24,12.7)
  rect 1.5x1.5 hole 0.9: 169(-15.24,15.24)
  silkscreen extent -17.78,-17.78 17.78,17.78

## Part data
BH1 BH2 BH3 BH4 TH2 TH3 TH3 TH4 TH5 TH6 TH7 TH8: "Extra tall female header (SMD)"
C1 C2 C3 C4: "IC COUNTER BIN 12STAGE 16-TSSOP"
OB1 OB2 OB3 OB4 OB5 OB6 OB7 OB8 OB9 OB10 OB11 OB12 OB13 OB14 OB15 OB16: "IC 8BIT SHIFT REGISTER 16TSSOP"
S1 S2 S3 S4 S5 S6 S7 S8: "IC SRAM 1MBIT 10NS 44TSOP"
V1 V2 V3 V4 V5 V6 V7 V8 V9 V10 V11 V12 V13 V14 V15 V16: "IC TRANSLATOR LEVEL 8CH 20-TSSOP"
ZIF: "CONN SOCKET PGA ZIF 169POS GOLD"

## Via types
v1: diameter 30, hole 15, Top Layer to Bottom Layer, 1070 vias

## Nets (pads, with @x,y where several pads share a name; then routed paths per layer and width w, separated by ;. In a path a pad name is that pad's centre, name@x,y a point inside that pad or via, vN(x,y) a via of type N, cw(c..) or ccw(c..) an arc to the next point about the centre after c; other vN are vias at no path point)
3V3: BH3.22 C1.VCC C2.VCC C3.VCC C4.VCC OB1.VCC OB2.VCC OB3.VCC OB4.VCC OB5.VCC OB6.VCC OB7.VCC OB8.VCC OB9.VCC OB10.VCC OB11.VCC OB12.VCC OB13.VCC OB14.VCC OB15.VCC OB16.VCC S1.VDD S2.VDD S3.VDD S4.VDD S5.VDD S6.VDD S7.VDD S8.VDD V1.VL V2.VL V3.VL V4.VL V5.VL V6.VL V7.VL V8.VL V9.VL V10.VL V11.VL V12.VL V13.VL V14.VL V15.VL V16.VL | length 48023.3
  Top Layer w7: v1(198,1177.5) 295.5,1275 538.24,1275 614.25,1198.98 S2.VDD@614.25,1048.62 614.25,1023.5 582.5,991.75 582.5,940 ; S5.VDD@233.62,4840.75 274.5,4840.75 ; v1(300.63,4814.63) 274.5,4840.75 ; V9.VL@359.57,4166.14 v1(359.57,4231.02) ; v1(379,4882) 337.75,4840.75 274.5,4840.75 ; v1(466,5238) 466,4863.25 520,4809.25 S5.VDD@686.38,4809.25 ; S1.VDD@614.25,233.62 S1.VDD@614.25,250.76 ; S1.VDD@645.75,686.38 645.75,830.69 629.43,847 600.57,847 528.57,775 391,775 362,746 ; S2.VDD@645.75,1501.38 645.75,1580 705.75,1640 v1(737,1640) ; v1(686,4297) 713.57,4297 759.57,4251 ; v1(745,4286) 759.57,4271.43 759.57,4251 ; V10.VL@759.57,4166.14 759.57,4251 ; v1(823,902) 802,923 599.5,923 582.5,940 ; v1(967,5079) 918.5,5030.5 918.5,4884 959.5,4843 1017.25,4843 1019.5,4840.75 S6.VDD@1048.62,4840.75 ; v1(1139.57,4271.02) 1159.57,4251.02 V11.VL@1159.57,4166.14 ; V1.VL@1308.86,359.57 1346.57,359.57 1367,380 v1(1367,450) ; V2.VL@1308.86,759.57 1363,759.57 1393.43,790 1409,790 v1(1414,795) ; V3.VL@1308.86,1159.57 1339.57,1159.57 v1(1414,1234) ; V4.VL@1308.86,1559.57 v1(1374.43,1559.57) ; S6.VDD@1501.38,4809.25 v1(1560,4809.25) ; V12.VL@1559.57,4166.14 1559.57,4200 ; v1(1580,4228.84) 1559.57,4208.41 1559.57,4200 ; v1(1641,4420) 1683,4378 1683,4323.43 1559.57,4200 ; v1@3772,999 3732,959 3732,669.75 3756,645.75 v1(3915,645.75) S4.VDD@3973.62,645.75 ; v1(3870.43,1223.98) 3910.43,1263.98 V8.VL@3910.43,1308.86 ; v1(4075,5061) 4124.43,5110.43 V13.VL@4166.14,5110.43 ; v1(4103.58,3868.5) 4103.58,3890.43 4123.58,3910.43 V16.VL@4166.14,3910.43 ; v1(4103.58,4270.43) 4103.58,4290.43 4123.58,4310.43 V15.VL@4166.14,4310.43 ; v1(4103.58,4690.43) 4123.58,4710.43 V14.VL@4166.14,4710.43 ; V7.VL@4310.43,1308.86 4310.43,1280 4271.43,1241 v1(4177,1241) 4234,1184 v1(4331,1184) ; S4.VDD@4426.38,614.25 4481.75,614.25 4514,582 4514,532.5 4524,522.5 4524,377 v1(4538,363) ; V6.VL@4710.43,1308.86 4710.43,1219.4 4725.86,1203.98 4725.86,1188.55 4730.43,1183.98 v1(4770.43,1183.98) ; v1(4754,4730) 4754,4664.75 4840.75,4578 ; S3.VDD@4788.62,645.75 4751.75,645.75 4701,595 4701,467 4742,426 4742,239 4786,195 4835,195 5013,373 5013,907 v1(5030,924) ; S8.VDD@4809.25,3973.62 4809.25,4007.24 4838.36,4036.35 4838.36,4065.8 4887.06,4114.49 4907.06,4114.49 v1(4954,4161.43) ; v1(4815.5,5105.5) 4895.5,5025.5 4895.5,4937 4809.25,4850.75 S7.VDD@4809.25,4788.62 4809.25,4750 4847,4712.25 4847,4607.75 4840.75,4601.5 4840.75,4578 ; S8.VDD@4840.75,4426.38 4840.75,4578 ; S7.VDD@4840.75,5241.38 4840.75,5201.25 v1(4861,5181) ; v1(5110.43,1223.98) V5.VL@5110.43,1308.86 ; S3.VDD@5241.38,614.25 5280,614.25 5300,634.25 v1(5300,654.25) ; 289,728 290,729 345,729 ; 289,728 272,711 272,624 446.94,449.06 507.64,449.06 617,339.7 ; 289,728 344,728 345,729 ; 345,729 362,746 ; 362,746 362,880 378,896 561,896 582.5,917.5 582.5,940 ; S1.VDD@614.25,250.76 614.25,273 617,275.75 ; S1.VDD@614.25,250.76 617,253.5 617,275.75 ; 617,275.75 634.25,293 v1(634.25,313) 634.25,322.45 617,339.7 ; 617,275.75 617,339.7
  Mid-Layer 1 w7: v1(198,1077) 220,1099 220,1535 ; v1(198,1177.5) 198,1513 220,1535 ; v1(379,4882) 379,4908 146,5141 146,5185 199,5238 ; v1(745,4286) 760,4301 1109.59,4301 v1(1139.57,4271.02) ; v1(967,5079) 1066,5178 ; v1(1414,1520) v1@1375,1559 ; v1(1641,4420) 1833,4612 3703.06,4612 3749.06,4658 3918.16,4658 3964.16,4612 4098,4612 4134,4576 4134,4300.85 v1(4103.58,4270.43) ; v1(3870.43,1223.98) 3870.43,1203.98 3732,1065.54 3732,959 ; v1(4075,5061) 4110,5096 4110,5111 ; v1(4103.58,3868.5) 4260.52,3868.5 4279.55,3887.52 4345.48,3887.52 4389.96,3932 4529.3,3932 4571.3,3974 4660.52,3974 4789.27,4102.74 4895.31,4102.74 v1(4954,4161.43) ; v1(4177,1241) 4177,1109.72 4067.28,1000 3773,1000 3733,960 ; v1(4331,1184) 4361,1214 4433,1214 4476,1171 4592,1171 4623,1140 4726.46,1140 v1(4770.43,1183.98) ; v1(4538,363) 4480,363 4396,447 4224,447 4027,644 3800,644 3733,711 ; v1(4775,4305) 4788,4318 4901,4318 4933.17,4350.17 4933.17,4360 4953.17,4380 5183.06,4380 v1(5321,4517.93) ; v1(4815.5,5105.5) 4803,5118 4590.05,5118 4574.05,5134 4363.5,5134 4340.5,5111 4110,5111 ; 199,5238 217.5,5256.5 539.5,5256.5 679,5396 1284,5396 ; 199,5238 v1(466,5238) 525,5238 574,5189 825,5189 870,5234 1051,5234 1066,5219 1066,5178 ; 220,1535 280,1595 692,1595 v1(737,1640) 737,1600 805.53,1531.47 1008.18,1531.47 1075.2,1598.5 1184.5,1598.5 1223.43,1559.57 ; 1066,5178 1284,5396 ; 1223.43,1559.57 1224,1559 v1@1375,1559 ; 1223.43,1559.57 v1(1374.43,1559.57) v1@1375,1559 ; 1284,5396 4106,5396 4133,5369 4133,5137 4110,5114 4110,5111 ; 3732,959 3733,960 ; 3732,959 3733,711 ; 3733,711 3733,960
  Mid-Layer 2 w7: v1(300.63,4814.63) 266,4780 266,4466.59 333,4399.59 333,4280 396,4217 384.8,4205.8 ; v1(359.57,4231.02) 384.8,4205.8 ; v1(607,2011) 521.5,2096.5 521.5,3750.5 396,3876 396,4194.59 384.8,4205.8 ; v1(647,1848) 737,1758 v1(737,1640) ; v1(1367,450) 1324,493 1324,1500 1344,1520 v1(1414,1520) ; v1(1414,795) 1509,890 1509,1499 1488,1520 v1(1414,1520) ; v1(1414,1234) 1445,1265 1445,1489 v1(1414,1520) ; v1(1560,4809.25) 1601,4768.25 1601,4460 v1(1641,4420) ; v1(4075,5061) 4051,5037 4051,4743.02 v1(4103.58,4690.43) ; v1(4177,1241) 4228.43,1241 4282,1187.43 4282,1105.84 4259,1082.84 4259,925 v1(4335.43,848.57) ; v1(4538,363) 4538,320.86 4667.86,191 4667.86,176.14 4678,166 4973,166 5172.28,365.28 5180,365.28 5192,377.28 5192,415 5095,512 5095,579.76 5022.42,652.34 5022.42,916.42 v1(5030,924) ; v1(4754,4730) 4748,4724 4748,4332 v1(4775,4305) ; v1(5110.43,1223.98) 5110.43,1183.98 5165.41,1129 5240,1129 5300,1069 v1(5300,654.25)
  Bottom Layer w7: v1(198,1077) 230,1045 230,957.07 C1.VCC@258.86,957.07 290,957.07 301,968.07 303,1020 543,1020 660,1137 736.73,1134.57 OB3.VCC@783.86,1134.57 ; OB9.VCC@338.57,4691.14 338.57,4727.07 357.07,4727.07 402.57,4772.57 402.57,4838.43 379,4862 v1(379,4882) ; v1(359.57,4231.02) 359.57,4236.57 410.5,4287.5 676.5,4287.5 v1(686,4297) ; v1(607,2011) 607,1920 639.5,1887.5 BH3.22@686.5,1887.5 ; v1(634.25,313) 659.25,338 739.07,338 ; v1(647,1848) BH3.22@686.5,1887.5 ; BH3.22@721.46,1887.5 BH3.22@686.5,1887.5 ; OB10.VCC@735.57,4691.14 735.57,4652.43 780,4608 810.5,4608 829,4589.5 829,4532 787.5,4490.5 787.5,4328.5 v1(745,4286) ; v1(737,1640) 737,1547.57 750,1534.57 OB4.VCC@783.86,1534.57 ; OB2.VCC@783.86,734.57 763.23,734.57 763.23,801.19 823,860.96 v1(823,902) ; C3.VCC@947.07,5161.14 947.07,5098.93 v1(967,5079) 967,5094 1125,5094 1138,5107 1199,5107 1232,5074 1232,4817 1328,4721 1328,4694 1280,4646 1147.57,4646 1133.57,4660 OB11.VCC@1133.57,4691.14 ; v1(1139.57,4271.02) 1159.57,4271.02 1234.59,4196 1547.16,4196 v1(1580,4228.84) ; v1(1414,795) 1445,764 1508,764 1552,720 1552,597 1600,549 2269,549 2370,650 2409,650 2439,680 2439,786 2480,827 3516,827 3547.5,858.5 3760.5,858.5 3836,783 OB8.VCC@3935.43,783 ; OB12.VCC@1532.57,4691.14 1532.57,4736.69 1531,4738.26 1531,4780.25 v1(1560,4809.25) ; v1(3915,645.75) 3935.43,666.18 OB8.VCC@3935.43,783 ; OB8.VCC@3935.43,783.86 OB8.VCC@3935.43,783 ; v1(4335.43,848.57) OB7.VCC@4335.43,783.86 4335.43,735.43 4331,731 4331,661 4342,650 4435.24,650 4457.24,628 4528.1,628 4603.5,703.4 4603.5,720 4626.5,743 4736.43,743 OB6.VCC@4736.43,783.86 ; C2.VCC@4517.93,258.86 4517.93,342.93 v1(4538,363) ; OB14.VCC@4691.14,3938.43 4627.93,3938.43 4582.5,3893 4582.5,3860 4596.5,3846 4622,3846 4687.5,3780.5 4927.5,3780.5 5193,4046 5193,4517.93 C4.VCC@5216.14,4517.93 v1(5321,4517.93) ; OB13.VCC@4691.14,4321.43 OB13.VCC@4707.57,4321.43 ; OB16.VCC@4691.14,4737.43 4746.57,4737.43 v1(4754,4730) ; OB15.VCC@4691.14,5135.43 4732.26,5135.43 4744.05,5134 ; v1(4770.43,1183.98) 4784.46,1198 4861,1198 4891,1168 5034.46,1168 5090.43,1223.98 v1(5110.43,1223.98) ; v1(4775,4305) 4758.57,4321.43 OB13.VCC@4707.57,4321.43 ; v1(4815.5,5105.5) 4795.5,5105.5 4770.18,5130.82 4744.05,5134 ; v1(4861,5181) 4861,5175.5 4819.5,5134 4744.05,5134 ; v1(4954,4161.43) 4938.93,4176.5 4852.5,4176.5 OB13.VCC@4707.57,4321.43 ; v1(5030,924) 5128.43,825.57 OB5.VCC@5128.43,783.86 ; 739.07,338 OB1.VCC@783.86,334.57 742.5,334.57 739.07,338
  other v1: 3772,1000
ADDRA_B0: C4.ADDR0 S7.ADDR0 S8.ADDR0 | length 2663.6
  Top Layer w7: S8.ADDR0@4620.28,3973.62 4620.28,3941.95 4649.27,3912.96 4649.27,3860 4635.27,3846 4519,3846 4441.8,3923.2 4441.8,4040.71 4428.42,4054.09 4428.42,4111.08 4355,4184.5 4355,4248 4373.5,4266.5 4373.5,4344.59 4338,4380.09 4338,4665 4456,4783 4456,4973 4508,5025 4569.5,5025 4584,5010.5 4584,4933.28 4620.28,4897 ; S7.ADDR0@4620.28,4788.62 4620.28,4897 ; v1(4698.28,4975) 4620.28,4897
  Bottom Layer w7: v1(4698.28,4975) 4716.28,4957 4837.5,4957 4840.5,4954 4959.07,4954 5216,4697.07 C4.ADDR0@5216.14,4697.07
ADDRA_B1: C4.ADDR1 S7.ADDR1 S8.ADDR1 | length 2533.2
  Top Layer w7: S7.ADDR1@4588.78,4788.62 4588.78,4755 4556.78,4723 4518,4723 4436.72,4641.72 4436.72,4506.76 4419.5,4489.53 4419.5,4347.05 4410,4337.55 4410,4240.5 4433.5,4217 4520,4217 4618,4119 4618,4033 4588.78,4003.78 S8.ADDR1@4588.78,3973.62 4588.78,3897.22 v1(4611,3875)
  Bottom Layer w7: v1(4611,3875) 4664,3875 4699,3840 4784,3840 5017,4073 5017,4320.69 5001.5,4336.19 5001.5,4364.5 4905,4461 4905,4501 4891,4515 4859,4515 4849,4525 4849,4683.39 4860,4694.39 4920.09,4694.39 4943,4671.48 C4.ADDR1@4983.86,4671.48
ADDRA_B2: C4.ADDR2 S7.ADDR2 S8.ADDR2 | length 1755.4
  Top Layer w7: v1(4555,4996) 4557.28,4993.72 S7.ADDR2@4557.28,4788.62 ; S8.ADDR2@4557.28,3973.62 4557.28,4065.28 v1(4589,4097)
  Mid-Layer 2 w7: v1(4555,4996) 4555,4969.76 4765.76,4759 ; v1(4589,4097) 4674,4097 4740,4163 4740,4295.5 4730.5,4305 4730.5,4649.5 4714,4666 4714,4732.5 4740.5,4759 4765.76,4759 ; v1(4879,4656) 4868.76,4656 4765.76,4759
  Bottom Layer w7: v1(4879,4656) 4889.11,4645.89 C4.ADDR2@4983.86,4645.89
ADDRA_B3: C4.ADDR3 S7.ADDR3 S8.ADDR3 | length 1950.1
  Top Layer w7: v1(4401.5,4608) 4401.5,4638.5 ; S8.ADDR3@4525.79,3973.62 4525.79,3946.79 4510,3931 4480,3931 4458.8,3952.2 4458.8,4105.7 4372,4192.5 4372,4231 4391,4250 4391,4352.31 4402.5,4363.81 4402.5,4438 4362.12,4478.38 4362.12,4599.12 4401.5,4638.5 ; S7.ADDR3@4525.79,4788.62 4525.79,4762.79 4401.5,4638.5
  Mid-Layer 1 w7: v1(4401.5,4608) 4409.5,4616 4824.5,4616 4847,4638.5 4847,4680.74 4856.42,4690.17 5038.83,4690.17 v1(5069.3,4659.7)
  Bottom Layer w7: C4.ADDR3@4983.86,4620.3 5029.89,4620.3 v1(5069.3,4659.7)
ADDRA_B4: C4.ADDR4 S7.ADDR4 S8.ADDR4 | length 2270
  Top Layer w7: v1(4401,4205) 4476,4130 4476,4025.54 4494.29,4007.24 S8.ADDR4@4494.29,3973.62 ; v1(4492,4962.69) 4492,4828.68 4494.29,4826.39 S7.ADDR4@4494.29,4788.62
  Mid-Layer 1 w7: v1(4401,4205) 4481,4205 4528.93,4252.93 4579.36,4252.93 4600.1,4232.19 4657.1,4232.19 4663.14,4296.78 4720,4353.64 4843.64,4353.64 4904,4414 5067,4565 v1(5067,4589)
  Mid-Layer 2 w7: v1(4401,4205) 4476.95,4205 4492,4220.05 4492,4515.24 4481.5,4525.74 4481.5,4952.19 v1(4492,4962.69)
  Bottom Layer w7: C4.ADDR4@4983.86,4569.11 5047.11,4569.11 v1(5067,4589)
ADDRA_B5: C4.ADDR5 S7.ADDR5 S8.ADDR5 | length 2166
  Top Layer w7: v1(4398,5087) 4494.29,5183.29 S7.ADDR5@4494.29,5241.38 ; S8.ADDR5@4494.29,4426.38 4494.29,4355.71 4520,4330 4540,4330 4609,4261 v1(4629,4261)
  Mid-Layer 1 w7: v1(4629,4261) 4617.69,4272.31 v1(4456,4272.31) 4456,4330 4533.69,4330 4635.69,4432 4829.76,4432 4843,4445.24 4843,4508 v1(4878.52,4543.52)
  Mid-Layer 2 w7: v1(4398,5087) 4456,5029 v1(4456,4272.31)
  Bottom Layer w7: v1(4878.52,4543.52) C4.ADDR5@4983.86,4543.52
ADDRA_B6: C4.ADDR6 S7.ADDR6 S8.ADDR6 | length 1468.8
  Top Layer w7: S8.ADDR6@4525.79,4426.38 4525.79,4367.21 v1(4526,4367) ; S7.ADDR6@4525.79,5241.38 4525.79,5202.21 v1(4546,5182)
  Mid-Layer 1 w7: v1(4526,4367) 4618.5,4459.5 4805,4459.5 4825,4479.5 4825,4534.98 4884.73,4594.7 v1(4907.5,4594.7)
  Mid-Layer 2 w7: v1(4546,5182) 4659.53,5068.47 4659.53,4893.99 4859.14,4694.39 4893.09,4694.39 4907.5,4679.98 v1(4907.5,4594.7)
  Bottom Layer w7: v1(4907.5,4594.7) C4.ADDR6@4983.86,4594.7
ADDRA_B7: C4.ADDR7 S7.ADDR7 S8.ADDR7 | length 2678
  Top Layer w7: v1(4546,5300) 4557.28,5288.72 S7.ADDR7@4557.28,5241.38 ; S8.ADDR7@4557.28,4426.38 4557.28,4339.72 4600,4297 4641,4297 4729,4209 5212.04,4209 5216.04,4213 5237,4213 5323,4299 5323,4424.7 v1(5153,4594.7)
  Mid-Layer 1 w7: v1(4546,5300) 4553,5293 4809,5293 4821,5305 4821,5329 4839,5347 4885,5347 5033,5199 5033,4896 5153,4776 v1(5153,4594.7)
  Bottom Layer w7: v1(5153,4594.7) C4.ADDR7@5216.14,4594.7
ADDRA_B8: C4.ADDR8 S7.ADDR8 S8.ADDR8 | length 1567
  Top Layer w7: S8.ADDR8@5029.72,4426.38 5029.72,4348.28 v1(5030,4348) ; S7.ADDR8@5029.72,5241.38 5029.72,5078.55 v1(5073,5035.28)
  Mid-Layer 1 w7: v1(5030,4348) 5320,4348 5367,4395 5367,4594.3 v1(5341,4620.3) ; v1(5073,5035.28) 5073,4939.3 v1(5321,4691.3)
  Bottom Layer w7: C4.ADDR8@5216.14,4620.3 5250,4620.3 ; v1(5321,4691.3) 5250,4620.3 ; v1(5341,4620.3) 5250,4620.3
ADDRA_B9: C4.ADDR9 S7.ADDR9 S8.ADDR9 | length 1589.3
  Top Layer w7: S8.ADDR9@5061.22,4426.38 5061.22,4400 5073.22,4388 v1(5277,4388) ; S7.ADDR9@5061.22,5241.38 5061.22,5319 v1(5081.22,5339)
  Mid-Layer 1 w7: v1(5277,4388) 5350,4461 5350,4549 v1(5329.89,4569.11)
  Mid-Layer 2 w7: v1(5081.22,5339) 5168.5,5339 5173,5334.5 5173,4929 5278.7,4823.3 v1(5278.7,4569.11)
  Bottom Layer w7: C4.ADDR9@5216.14,4569.11 5253.7,4569.11 v1(5278.7,4569.11) v1(5329.89,4569.11)
ADDRA_B10: C4.ADDR10 S7.ADDR10 S8.ADDR10 | length 1065.6
  Top Layer w7: S8.ADDR10@5092.72,4426.38 5092.72,4457.28 5059,4491 5059,4516 5080,4537 v1@5123,4537 ; S7.ADDR10@5092.72,5241.38 5092.72,5072.56 5183,4982.28 5183,4727 5123,4667 5123,4567 5133.77,4556.23 v1(5133.77,4529.7) v1@5126.48,4537
  Bottom Layer w7: v1@5126.48,4537 v1(5133.77,4529.7) 5136.48,4527 5153,4543.52 C4.ADDR10@5216.14,4543.52
ADDRA_B11: C4.ADDR11 S7.ADDR11 S8.ADDR11 | length 1146.6
  Top Layer w7: v1(5089,4505.21) 5124.21,4470 S8.ADDR11@5124.21,4426.38 ; S7.ADDR11@5124.21,5241.38 5124.21,5280.21 v1(5144,5300)
  Mid-Layer 2 w7: v1(5089,4505.21) 5018.5,4575.71 5018.5,4681.5 5144,4807 v1(5144,5300)
  Bottom Layer w7: C4.ADDR11@4983.86,4517.93 5076.28,4517.93 v1(5089,4505.21)
ADDRB_B0: C3.ADDR0 S5.ADDR0 S6.ADDR0 | length 2237.4
  Top Layer w7: S5.ADDR0@686.38,4620.28 713.28,4620.28 v1(807,4714) ; v1(713,5224) 736.11,5224 751.11,5209 889,5209 975,5295 1083,5295 1319.5,5058.5 1319.5,4902.5 1262,4845 1262,4679.5 1284.5,4657 1442,4657 1470,4629 1470,4620.28 S6.ADDR0@1501.38,4620.28
  Mid-Layer 2 w7: v1(713,5224) 696.61,5207.61 696.61,4824.39 v1(807,4714)
  Bottom Layer w7: v1(713,5224) 733,5224 767.93,5189.07 C3.ADDR0@767.93,5161.14
ADDRB_B1: C3.ADDR1 S5.ADDR1 S6.ADDR1 | length 2883.2
  Top Layer w7: S5.ADDR1@686.38,4588.78 710.78,4588.78 759,4637 v1(799,4637) ; v1(809,5020) 809,5056.47 827.39,5074.86 827.39,5099.39 989,5261 1083,5261 1302.5,5041.5 1302.5,4915.5 1244.5,4857.5 1244.5,4602 1257.72,4588.78 S6.ADDR1@1501.38,4588.78
  Mid-Layer 2 w7: v1(799,4637) 855.5,4693.5 855.5,4783.52 713.61,4925.4 713.61,5101.61 737,5125 769.5,5125 809,5085.5 v1(809,5020)
  Bottom Layer w7: C3.ADDR1@793.52,4928.86 793.52,4900 781.32,4887.8 757.2,4887.8 635,5010 620,5010 598,5032 598,5071 611,5084 648,5084 712,5020 v1(809,5020)
ADDRB_B2: C3.ADDR2 S5.ADDR2 S6.ADDR2 | length 1987
  Top Layer w7: S5.ADDR2@686.38,4557.28 721,4557.28 763.37,4599.65 815.15,4599.65 835.5,4620 835.5,4746 810,4771.5 810,4941 v1(760,4991) ; v1(1442,4557) 1442.28,4557.28 S6.ADDR2@1501.38,4557.28
  Mid-Layer 1 w7: v1(760,4991) 906,4991 936,5021 1052,5021 1079,5048 1321.44,5048 1336.65,5032.79 1440,5032.79 1468,5004.79 1468,4935 1412,4879 1412,4844 1459,4797 1459,4574 v1(1442,4557)
  Bottom Layer w7: v1(760,4991) 788.11,4991 819.11,4960 C3.ADDR2@819.11,4928.86
ADDRB_B3: C3.ADDR3 S5.ADDR3 S6.ADDR3 | length 2005.1
  Top Layer w7: v1(844.7,4854) 853,4845.7 853,4548.29 830.5,4525.79 S5.ADDR3@686.38,4525.79 660,4525.79 648,4513.79 648,4423.95 920,4151.95 920,4109 960,4069 1164,4069 1286,4191 1286,4319 1350,4383 1350,4421 1454.79,4525.79 S6.ADDR3@1501.38,4525.79
  Bottom Layer w7: v1(844.7,4854) C3.ADDR3@844.7,4928.86
ADDRB_B4: C3.ADDR4 S5.ADDR4 S6.ADDR4 | length 3131.2
  Top Layer w7: S5.ADDR4@686.38,4494.29 768.71,4494.29 v1(833,4430) ; S6.ADDR4@1501.38,4494.29 1535.29,4494.29 1624,4583 v1(1624,4918)
  Mid-Layer 2 w7: v1(833,4430) 900,4430 921,4451 921,4599 943,4621 943,4813 933,4823 933,4885.29 858,4960.29 858,5055 871,5068 901,5068 920,5049 920,5002 961,4961 1011,4961 1156,5106 1170.96,5106 ; v1(990,4887) 990,4925.04 1170.96,5106 ; v1(1624,4918) 1624,4949 1467,5106 ; 1170.96,5106 1467,5106 ; 1170.96,5106 1171.96,5107 1466,5107 1467,5106
  Bottom Layer w7: C3.ADDR4@895.89,4928.86 895.89,4900 908.89,4887 v1(990,4887)
ADDRB_B5: C3.ADDR5 S5.ADDR5 S6.ADDR5 | length 2311.2
  Top Layer w7: S5.ADDR5@233.62,4494.29 266.71,4494.29 299,4462 v1(402,4462) ; S6.ADDR5@1048.62,4494.29 1073,4494.29 1160.79,4406.5 1242.13,4406.5 v1(1287,4451.37)
  Mid-Layer 1 w7: v1(402,4462) 415,4449 727.79,4449 792.79,4384 969.55,4384 1010.55,4425 1260.63,4425 v1(1287,4451.37)
  Mid-Layer 2 w7: v1(1287,4451.37) 1287,4701 v1(1293.5,4707.5)
  Bottom Layer w7: C3.ADDR5@921.48,4928.86 921.48,5000 942.48,5021 1066,5021 1215,4872 1215,4786 v1(1293.5,4707.5)
ADDRB_B6: C3.ADDR6 S5.ADDR6 S6.ADDR6 | length 2047
  Top Layer w7: v1(55,4555.08) 92.08,4518 198.95,4518 206.74,4525.79 S5.ADDR6@233.62,4525.79 ; v1(970,4525.79) S6.ADDR6@1048.62,4525.79
  Mid-Layer 1 w7: v1(55,4555.08) 214.92,4715 678.92,4715 850.92,4543 952.79,4543 v1(970,4525.79)
  Mid-Layer 2 w7: v1(890,5038) 901,5027 901,4995.34 956.08,4940.26 956.08,4866.42 979.5,4843 998,4843 1016,4825 1016,4571.79 v1(970,4525.79)
  Bottom Layer w7: C3.ADDR6@870.3,4928.86 870.3,5018.3 v1(890,5038)
ADDRB_B7: C3.ADDR7 S5.ADDR7 S6.ADDR7 | length 3799.7
  Top Layer w7: S5.ADDR7@233.62,4557.28 200,4557.28 177.72,4535 140.24,4535 129,4546.24 129,5244.67 200,5315.67 v1(320,5315.67) ; v1(890,4497.29) 950,4557.28 S6.ADDR7@1048.62,4557.28
  Mid-Layer 1 w7: v1(320,5315.67) 218.67,5315.67 128,5225 128,4904.13 189,4843.13 444,4843.13 533.87,4933 696.5,4933 1035.5,4594 1035.5,4499.5 1013.29,4477.29 910,4477.29 v1(890,4497.29)
  Bottom Layer w7: v1(320,5315.67) 336.33,5315.67 385.5,5266.5 843.8,5266.5 870.3,5240 C3.ADDR7@870.3,5161.14
ADDRB_B8: C3.ADDR8 S5.ADDR8 S6.ADDR8 | length 1378.8
  Top Layer w7: S5.ADDR8@233.62,5029.72 362,5029.72 v1(382,5049.72) ; S6.ADDR8@1048.62,5029.72 1091,5029.72 1138.28,5077 v1(1185,5077)
  Bottom Layer w7: v1(382,5049.72) 382,5083.22 480.78,5182 625,5182 747,5060 772,5060 844.7,5132.7 ; C3.ADDR8@844.7,5161.14 844.7,5132.7 ; v1(1185,5077) 1157,5049 936,5049 918,5067 844.7,5072.3 844.7,5132.7
ADDRB_B9: C3.ADDR9 S5.ADDR9 S6.ADDR9 | length 1315.4
  Top Layer w7: S5.ADDR9@233.62,5061.22 292.78,5061.22 v1(383.56,5152) ; v1(895.89,5098) 895.89,5108.89 1030,5243 1053.96,5243 1137,5159.96 1137,5100.86 1097.36,5061.22 S6.ADDR9@1048.62,5061.22
  Mid-Layer 1 w7: v1(383.56,5152) 412.78,5181.22 511.28,5181.22 540.5,5152 841.89,5152 v1(895.89,5098)
  Bottom Layer w7: v1(895.89,5098) 895.89,5123.58 C3.ADDR9@895.89,5161.14
ADDRB_B10: C3.ADDR10 S5.ADDR10 S6.ADDR10 | length 1347.3
  Top Layer w7: v1(175,5169.5) 175,5117.72 200,5092.72 S5.ADDR10@233.62,5092.72 ; v1(1035.57,5204) 987.74,5156.17 987.74,5124.98 1020,5092.72 S6.ADDR10@1048.62,5092.72
  Mid-Layer 1 w7: v1(175,5169.5) 204.5,5199 524.22,5199 553.22,5170 1001.57,5170 v1(1035.57,5204)
  Bottom Layer w7: C3.ADDR10@921.48,5161.14 921.48,5200 925.48,5204 v1(1035.57,5204)
ADDRB_B11: C3.ADDR11 S5.ADDR11 S6.ADDR11 | length 1178.8
  Top Layer w7: S5.ADDR11@233.62,5124.21 292.79,5124.21 v1(294,5123) ; S6.ADDR11@1048.62,5124.21 1107.79,5124.21 v1(1108,5124)
  Mid-Layer 1 w7: v1(294,5123) 353.89,5123 526.39,4950.5 570,4950.5 615.5,4996 690,4996 724,4962 944.63,4962 v1(973.5,4990.87)
  Mid-Layer 2 w7: v1(973.5,4990.87) 1106.63,5124 v1(1108,5124)
  Bottom Layer w7: C3.ADDR11@947.07,4928.86 947.07,4964.43 v1(973.5,4990.87)
ADDRC_B0: C2.ADDR0 S3.ADDR0 S4.ADDR0 | length 2429.6
  Top Layer w7: S4.ADDR0@3973.62,834.72 4032,834.72 4049.72,817 4091,817 4187,721 4187,693.7 4207,673.7 4207,197 4259,145 4530,145 4591,206 4687,206 v1(4697,196) ; S3.ADDR0@4788.62,834.72 4861,834.72 4877.81,817.92 4912.26,817.92 4946.34,852 4980,852 4993,839 4993,408 4978,395 v1(4808,225)
  Bottom Layer w7: v1(4697,196) 4697.07,196.07 4697.07,225 ; C2.ADDR0@4697.07,258.86 4697.07,225 ; v1(4808,225) 4697.07,225
ADDRC_B1: C2.ADDR1 S3.ADDR1 S4.ADDR1 | length 2566.2
  Top Layer w7: S4.ADDR1@3973.62,866.22 4017.22,866.22 4027,876 4128.65,876 4206,798.65 4206,715.7 4224.81,696.9 4224.81,217.69 4279.5,163 4514.96,163 4660,308.04 4660,345 4710,395 4710,433 4671,472 v1(4671,554) ; S3.ADDR1@4788.62,866.22 4841.48,866.22 4869.26,894 4924,894 v1(4951,921)
  Bottom Layer w7: v1(4671,554) 4671.48,553.52 4671.48,520 ; C2.ADDR1@4671.48,491.14 4671.48,520 ; v1(4951,921) 5008.34,863.66 5008.34,717.34 4983,692 4920.26,692 4894,665.74 4894,637 4860,603 4780,533 4684.48,533 4671.48,520
ADDRC_B2: C2.ADDR2 S3.ADDR2 S4.ADDR2 | length 3067.1
  Top Layer w7: S4.ADDR2@3973.62,897.72 4130.98,897.72 4225,803.7 4225,730.08 4241.81,713.27 4241.81,254.69 4297,199.5 4515.5,199.5 4618,302 4618,347 v1(4680,409) 4531.5,557.5 4531.5,608 4551,627.5 4551,786 4481.5,855.5 4481.5,880 4497,895.5 4563,895.5 4633,825.5 4680,825.5 4734,879.5 4734,945.5 4751.5,963 4751.5,990.5 4789,1028 4978.5,1028 4998,1008.5 4998,961.23 4987.77,951 4924,951 4884,911 4837.76,911 4822.24,897.72 S3.ADDR2@4788.62,897.72
  Bottom Layer w7: C2.ADDR2@4645.89,491.14 4645.89,443.11 v1(4680,409)
ADDRC_B3: C2.ADDR3 S3.ADDR3 S4.ADDR3 | length 1595.4
  Top Layer w7: v1(3889,951) 3910.79,929.21 S4.ADDR3@3973.62,929.21 ; v1(4609,567) 4609,610 4682,683 4682,746.5 4751.5,816 4751.5,926.02 4754.69,929.21 S3.ADDR3@4788.62,929.21
  Mid-Layer 1 w7: v1(3889,951) 3964,951 4039,876 4121.48,876 4137.48,860 4137.48,752.02 4160,729.5 4191.48,729.5 4270.98,650 4445,650 4555,540 4582,540 v1(4609,567)
  Bottom Layer w7: v1(4609,567) 4620.3,555.7 C2.ADDR3@4620.3,491.14
ADDRC_B4: C2.ADDR4 S3.ADDR4 S4.ADDR4 | length 2018.2
  Top Layer w7: S4.ADDR4@3973.62,960.71 4000.29,960.71 4011,950 4011,940 4031,920 4088,920 4108,940 4148,940 4156,932 v1(4156,913) ; S3.ADDR4@4788.62,960.71 4816.83,960.71 4854.12,998 v1(4968,998)
  Mid-Layer 1 w7: v1(4560,579.76) 4542.59,579.76 4209.35,913 v1(4156,913) 4219.36,913 4245,938.64 4245,999.5 4269.3,1023.8 4517.8,1023.8 4577,1083 4716.11,1083 4759.48,1039.63 4926.37,1039.63 v1(4968,998)
  Bottom Layer w7: v1(4560,579.76) 4569.11,570.65 C2.ADDR4@4569.11,491.14
ADDRC_B5: C2.ADDR5 S3.ADDR5 S4.ADDR5 | length 2870.9
  Top Layer w7: S4.ADDR5@4426.38,960.71 4460,960.71 4475.29,976 4621,976 4640,995 4640,1093 4680,1133 4991.81,1133 5139.81,985 ; v1(5081,1009) 5105,985 5139.81,985 ; S3.ADDR5@5241.38,960.71 5164.1,960.71 5139.81,985
  Mid-Layer 1 w7: v1(4554,429) 4639,514 4639,668 4525.5,781.5 4465,781.5 4445,801.5 4445,880.5 4363,962.5 4346.5,962.5 4319,935 4277.5,935 4262,950.5 4262,980 4279,997 4911,997 4938.5,969.5 5034,969.5 5073.5,1009 v1(5081,1009)
  Bottom Layer w7: C2.ADDR5@4543.52,491.14 4543.52,445 4554,434.52 v1(4554,429)
ADDRC_B6: C2.ADDR6 S3.ADDR6 S4.ADDR6 | length 4602.2
  Top Layer w7: v1(4291,964) 4361,964 4395.79,929.21 S4.ADDR6@4426.38,929.21 ; S3.ADDR6@5241.38,929.21 5274.21,929.21 5285,940 5285,994 v1(5351,1060)
  Mid-Layer 1 w7: v1(4291,964) 4307,980 4370,980 4481.5,868.5 4481.5,840 4522.5,799 4680,799 4760,719 4760,657.5 4701,598.5 4701,506 4621,426 v1(4621,406)
  Mid-Layer 2 w7: v1(4621,406) 4562,465 4500,465 4399,364 4332,364 4288,408 4236,408 4232,120 4276,76 5233,76 5348.5,191.5 5348.5,575.5 5412,639 5412,1173.79 5395.79,1190 5330.5,1190 5313,1172.5 5313,1098 v1(5351,1060)
  Bottom Layer w7: C2.ADDR6@4594.7,491.14 4594.7,452.3 4621,426 v1(4621,406)
ADDRC_B7: C2.ADDR7 S3.ADDR7 S4.ADDR7 | length 2349.2
  Top Layer w7: S4.ADDR7@4426.38,897.72 4464.5,897.72 4479.78,913 4540,913 4556,929 4689.66,929 4720.69,960.03 4720.69,1080 4749.69,1109 4792,1109 4830,1071 4893,1071 4931,1109 4982,1109 5035.5,1055.5 5035.5,963.5 5060,939 5060,888 5032,860 5032,840 ; v1(4635,176) 4645,166 4833,166 5032,365 5032,840 ; S3.ADDR7@5241.38,897.72 5089.72,897.72 5032,840
  Bottom Layer w7: C2.ADDR7@4594.7,258.86 4594.7,216.3 v1(4635,176)
ADDRC_B8: C2.ADDR8 S3.ADDR8 S4.ADDR8 | length 3970.8
  Top Layer w7: v1(4270.31,378) 4317.58,425.28 S4.ADDR8@4426.38,425.28 ; S3.ADDR8@5241.38,425.28 5299.72,425.28 v1(5300,425)
  Mid-Layer 2 w7: v1(4270.31,378) 4320.31,328 4380,328 4561,147 5181,147 5234,200 5234,359 v1(5300,425)
  Bottom Layer w7: v1(4270.31,378) 4270.31,135.69 4338,68 5076,68 5329,321 5329,360 5309.5,379.5 5272.5,379.5 5128,235 4839.5,235 4795,279.5 4795,317.94 4749.44,363.5 4666.56,363.5 4620.3,317.24 C2.ADDR8@4620.3,258.86
ADDRC_B9: C2.ADDR9 S3.ADDR9 S4.ADDR9 | length 1159.5
  Top Layer w7: v1(4347.76,393.78) S4.ADDR9@4426.38,393.78 ; v1(5163,393.78) S3.ADDR9@5241.38,393.78
  Mid-Layer 1 w7: v1(4347.76,393.78) 4367.76,393.78 4439.54,322 v1(4589.11,322)
  Mid-Layer 2 w7: v1(4589.11,322) 4657.11,254 5023.22,254 v1(5163,393.78)
  Bottom Layer w7: C2.ADDR9@4569.11,258.86 4569.11,302 v1(4589.11,322)
ADDRC_B10: C2.ADDR10 S3.ADDR10 S4.ADDR10 | length 1523.3
  Top Layer w7: v1(4315,228) 4315,324.5 4352.78,362.28 S4.ADDR10@4426.38,362.28 ; S3.ADDR10@5241.38,362.28 5279.72,362.28 v1(5300,342)
  Bottom Layer w7: v1(4315,228) 4329,214 4530,214 4543.52,227.52 ; C2.ADDR10@4543.52,258.86 4543.52,227.52 ; v1(5300,342) 5043.5,85.5 4617.39,85.5 4543.52,159.36 4543.52,227.52
ADDRC_B11: C2.ADDR11 S3.ADDR11 S4.ADDR11 | length 1416.8
  Top Layer w7: v1(4348,271) 4348,311 4367.79,330.79 S4.ADDR11@4426.38,330.79 4460,330.79 4486.9,357.68 v1(4486.9,399.9) ; v1(5182,330.79) S3.ADDR11@5241.38,330.79
  Mid-Layer 1 w7: v1(4348,271) 4534,85 4936.21,85 v1(5182,330.79)
  Bottom Layer w7: v1(4486.9,399.9) 4517.93,430.93 C2.ADDR11@4517.93,491.14
ADDRD_B0: C1.ADDR0 S1.ADDR0 S2.ADDR0 | length 2053.8
  Top Layer w7: S2.ADDR0@834.72,1501.38 834.72,1410.55 880,1365.28 955.72,1365.28 1015,1306 1015,910 965.63,860.63 965.63,821.4 925,780.77 925,760.77 900.17,735.94 854.66,735.94 834.72,716 S1.ADDR0@834.72,686.38 834.72,600.78 v1(875,560.5)
  Mid-Layer 1 w7: v1(333,757.93) 333,549.58 379.58,503 667.45,503 710.45,546 860.5,546 v1(875,560.5)
  Bottom Layer w7: C1.ADDR0@258.86,777.93 313,777.93 v1(333,757.93)
ADDRD_B1: C1.ADDR1 S1.ADDR1 S2.ADDR1 | length 2276.7
  Top Layer w7: v1(846,1642.51) 866.22,1622.29 S2.ADDR1@866.22,1501.38 ; v1(866.22,627) S1.ADDR1@866.22,686.38
  Mid-Layer 1 w7: v1(428,804) 370,746 370,579 385.45,563.55 802.77,563.55 v1(866.22,627)
  Mid-Layer 2 w7: v1(428,804) 399,804 351,852 351,875 383,907 383,928 419,964 419,1167.6 481.12,1229.73 646.96,1229.73 657,1239.77 657,1274 683,1300 746.17,1300 804,1357.83 804,1600.51 v1(846,1642.51)
  Bottom Layer w7: v1(428,804) 428.48,803.52 C1.ADDR1@491.14,803.52
ADDRD_B2: C1.ADDR2 S1.ADDR2 S2.ADDR2 | length 1729.4
  Top Layer w7: v1(878,1442) 897.72,1461.72 S2.ADDR2@897.72,1501.38 ; S1.ADDR2@897.72,686.38 897.72,627.76 v1(917.72,607.76)
  Mid-Layer 2 w7: v1(554,849) 511.25,891.75 511.25,988.45 672.13,1149.34 726.87,1149.34 878,1300.46 ; v1(878,1442) 878,1300.46 ; v1(917.72,607.76) 917.72,799.49 878,839.21 878,1300.46
  Bottom Layer w7: C1.ADDR2@491.14,829.11 534.11,829.11 v1(554,849)
ADDRD_B3: C1.ADDR3 S1.ADDR3 S2.ADDR3 | length 2051.7
  Top Layer w7: v1(577,532) 629,480 775,480 811,516 903.97,516 948,560.03 948,635 929.21,653.79 S1.ADDR3@929.21,686.38 929.21,710.49 944.92,726.2 960,726.2 1045.08,811.28 1045.08,1415.62 999.7,1461 938.21,1461 S2.ADDR3@929.21,1501.38
  Bottom Layer w7: C1.ADDR3@491.14,854.7 433.7,854.7 376.78,797.78 376.78,728.22 440,665 529,665 553,641 553,556 v1(577,532)
ADDRD_B4: C1.ADDR4 S1.ADDR4 S2.ADDR4 | length 4476.7
  Top Layer w7: S1.ADDR4@960.71,686.38 960.71,655 987,655 1033,701 1033,756 1110,833 1110,1180 ; S2.ADDR4@960.71,1501.38 960.71,1490 1058,1490 1109,1439 1109,1333 1091,1315 1091,1206 1110,1187 1110,1180 ; v1(1186,1256) 1110,1180
  Mid-Layer 2 w7: v1(429,925) 436,932 436,1143 493,1200 641.27,1200 699.5,1258.23 699.5,1272 710,1282.5 760.5,1282.5 843,1365 843,1460 855,1472 894,1472 912,1454 912,1171 947.5,1135.5 947.5,851.5 984,815 984,555 876,447 876,389.03 878,387.03 918.03,387.03 1041,510 1041,912 1033,920 1033,1262 1080,1309 1133,1309 v1(1186,1256)
  Bottom Layer w7: v1(429,925) 448.11,905.89 C1.ADDR4@491.14,905.89
ADDRD_B5: C1.ADDR5 S1.ADDR5 S2.ADDR5 | length 1549.7
  Top Layer w7: v1(687,811) 696,820 870.23,820 890.23,840 890.23,879.67 910.17,879.67 960.71,930.21 S2.ADDR5@960.71,1048.62 ; S1.ADDR5@960.71,233.62 v1(960.71,377.29)
  Mid-Layer 1 w7: v1(554,951) 582.09,922.91 640.73,922.91 687,876.64 v1(687,811)
  Mid-Layer 2 w7: v1(687,811) 666,790 666,548.47 844.47,370 937,370 v1(960.71,377.29)
  Bottom Layer w7: C1.ADDR5@491.14,931.48 534.48,931.48 v1(554,951)
ADDRD_B6: C1.ADDR6 S1.ADDR6 S2.ADDR6 | length 3795.4
  Top Layer w7: v1(772.5,855) 848.23,855 873.23,880 873.23,896.67 884.8,896.67 929.21,941.08 S2.ADDR6@929.21,1048.62 929.21,1087.39 978,1136.18 978,1209.82 964.82,1223 886.86,1223 825.86,1284 663.24,1284 654.55,1292.68 266.25,1292.68 127,1153.44 127,120 166,81 864.21,81 929.21,146 S1.ADDR6@929.21,233.62
  Mid-Layer 1 w7: v1(612,894) 658,848 658,794.5 670.5,782 699.5,782 v1(772.5,855)
  Bottom Layer w7: C1.ADDR6@491.14,880.3 598.3,880.3 v1(612,894)
ADDRD_B7: C1.ADDR7 S1.ADDR7 S2.ADDR7 | length 1850.2
  Top Layer w7: v1(391,866) 403,878 582,878 595,865 638,865 663.17,890.17 794.5,890.17 811.67,873 839.5,873 856,889.5 856,913.43 897.72,955.15 S2.ADDR7@897.72,1048.62 ; v1(897.72,175) S1.ADDR7@897.72,233.62
  Mid-Layer 2 w7: v1(391,866) 409,866 475,800 475,485.17 618.67,341.5 731.22,341.5 v1(897.72,175)
  Bottom Layer w7: C1.ADDR7@258.86,880.3 376.7,880.3 v1(391,866)
ADDRD_B8: C1.ADDR8 S1.ADDR8 S2.ADDR8 | length 1224.9
  Top Layer w7: v1(196.3,854.7) 228,823 228,574 419.5,382.5 419.5,323.5 425.28,317.72 S1.ADDR8@425.28,233.62 ; v1(384.72,1107.72) 404.72,1107.72 425.28,1087.17 S2.ADDR8@425.28,1048.62
  Mid-Layer 1 w7: v1(196.3,854.7) 302.59,961 350,961 384.72,995.72 v1(384.72,1107.72)
  Bottom Layer w7: v1(196.3,854.7) C1.ADDR8@258.86,854.7
ADDRD_B9: C1.ADDR9 S1.ADDR9 S2.ADDR9 | length 1401.2
  Top Layer w7: v1(172.86,905.89) 178.75,900 338,900 393.78,955.78 S2.ADDR9@393.78,1048.62 ; v1(302,175) 368.78,175 393.78,200 S1.ADDR9@393.78,233.62
  Mid-Layer 2 w7: v1(172.86,905.89) 105.5,838.53 105.5,371.5 v1(302,175)
  Bottom Layer w7: v1(172.86,905.89) C1.ADDR9@258.86,905.89